# Allegro board NVR.brd
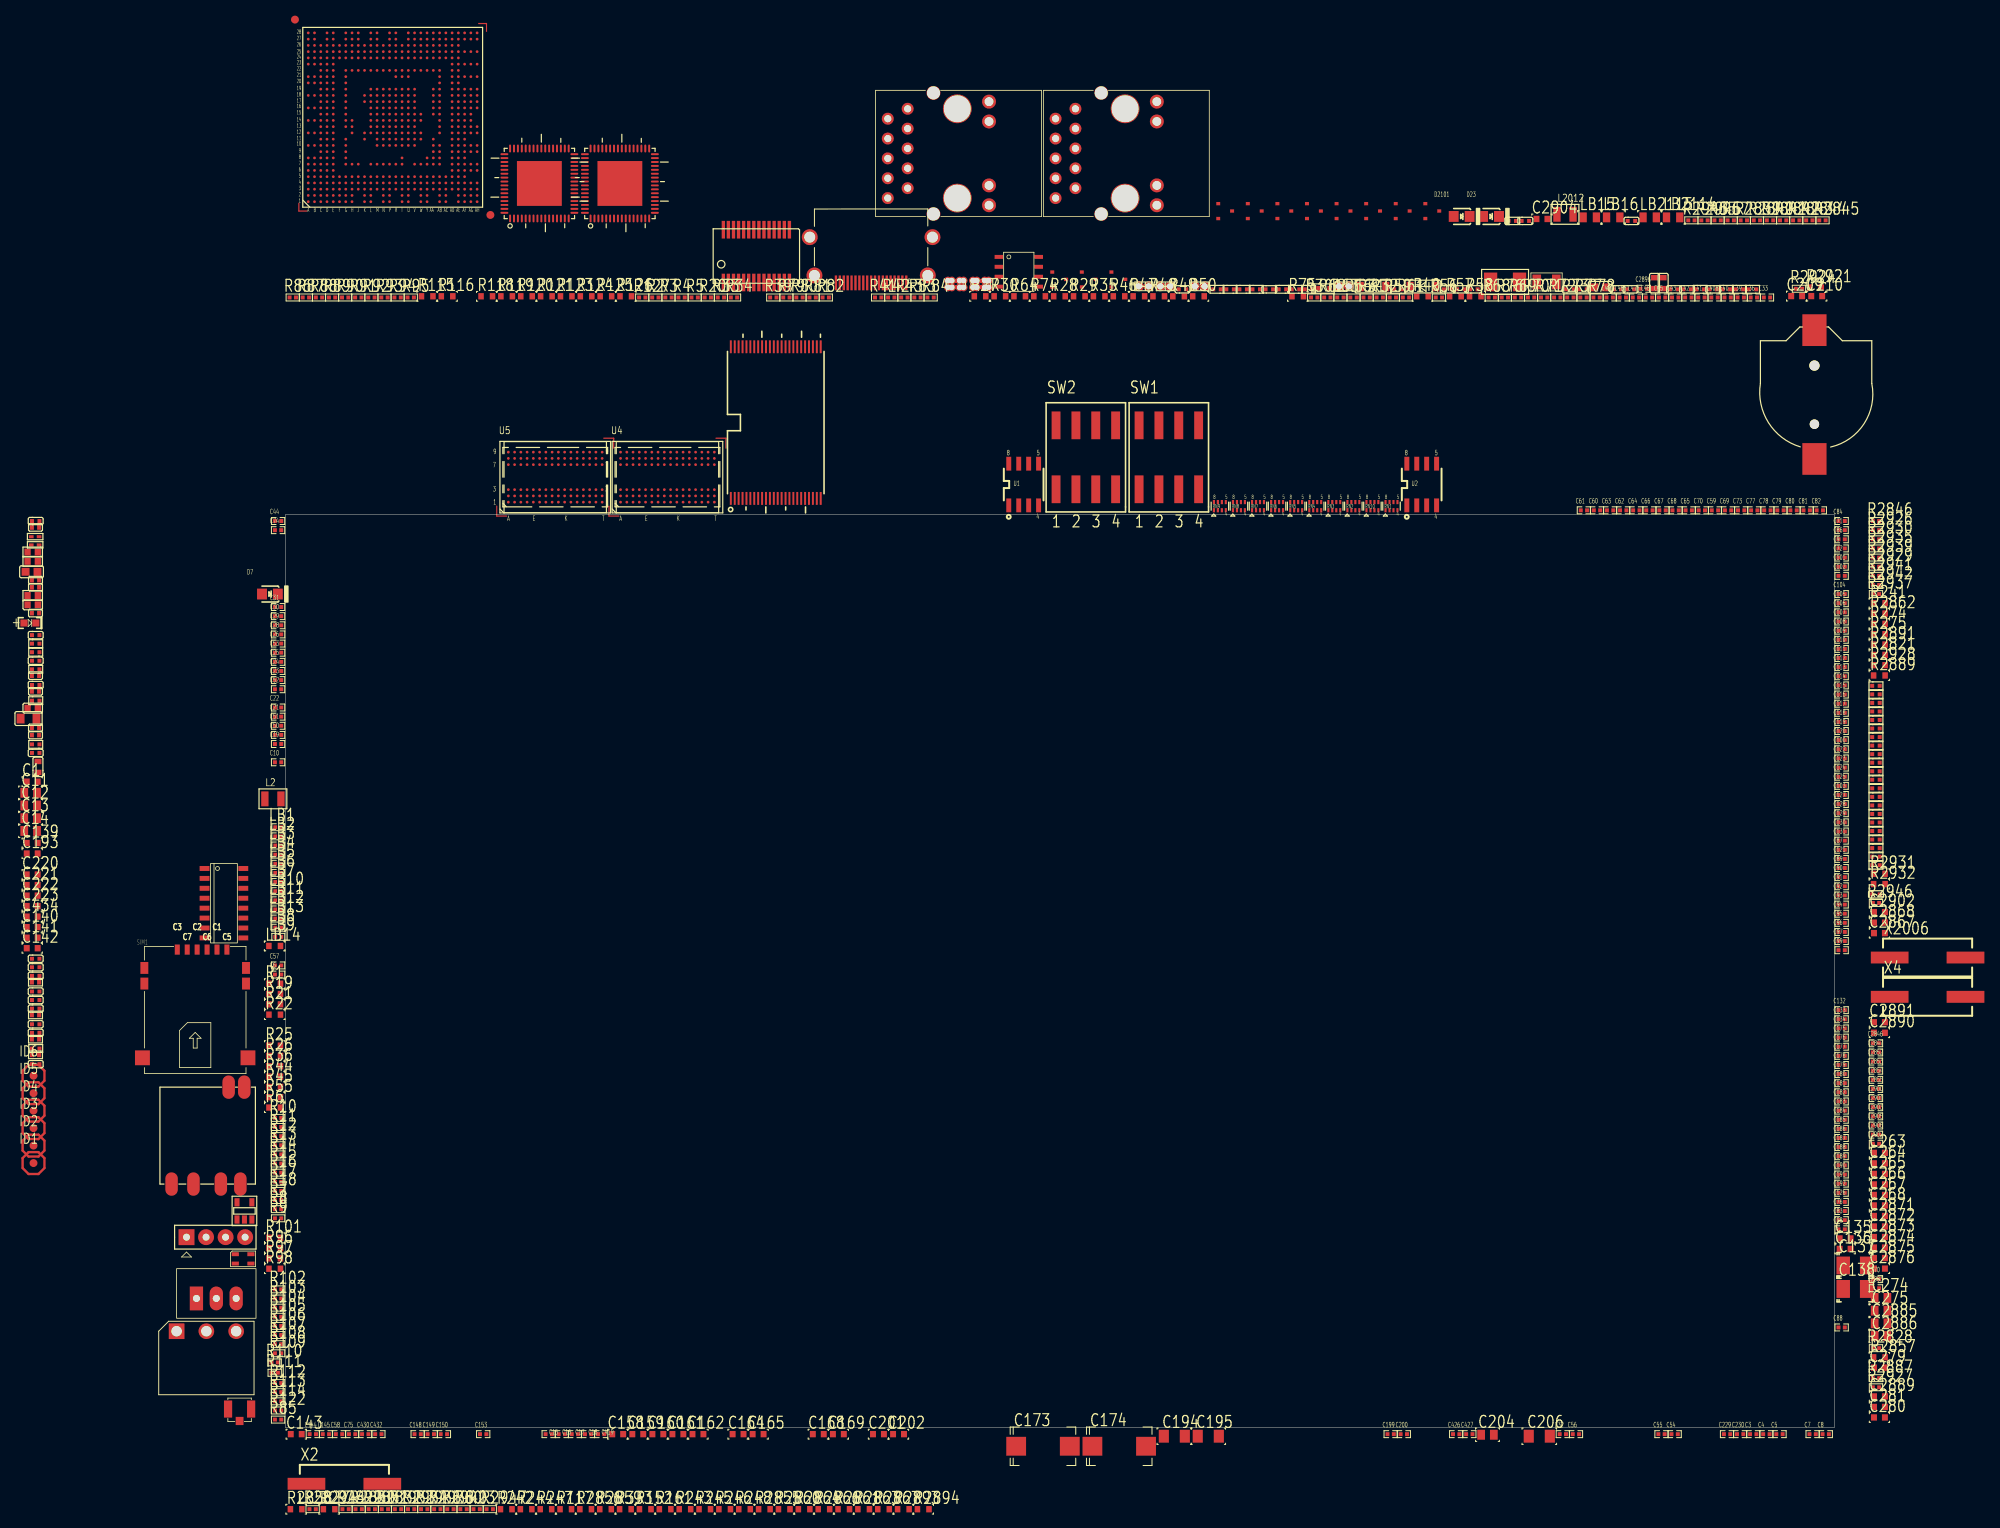
[diagram p0: board, top side]
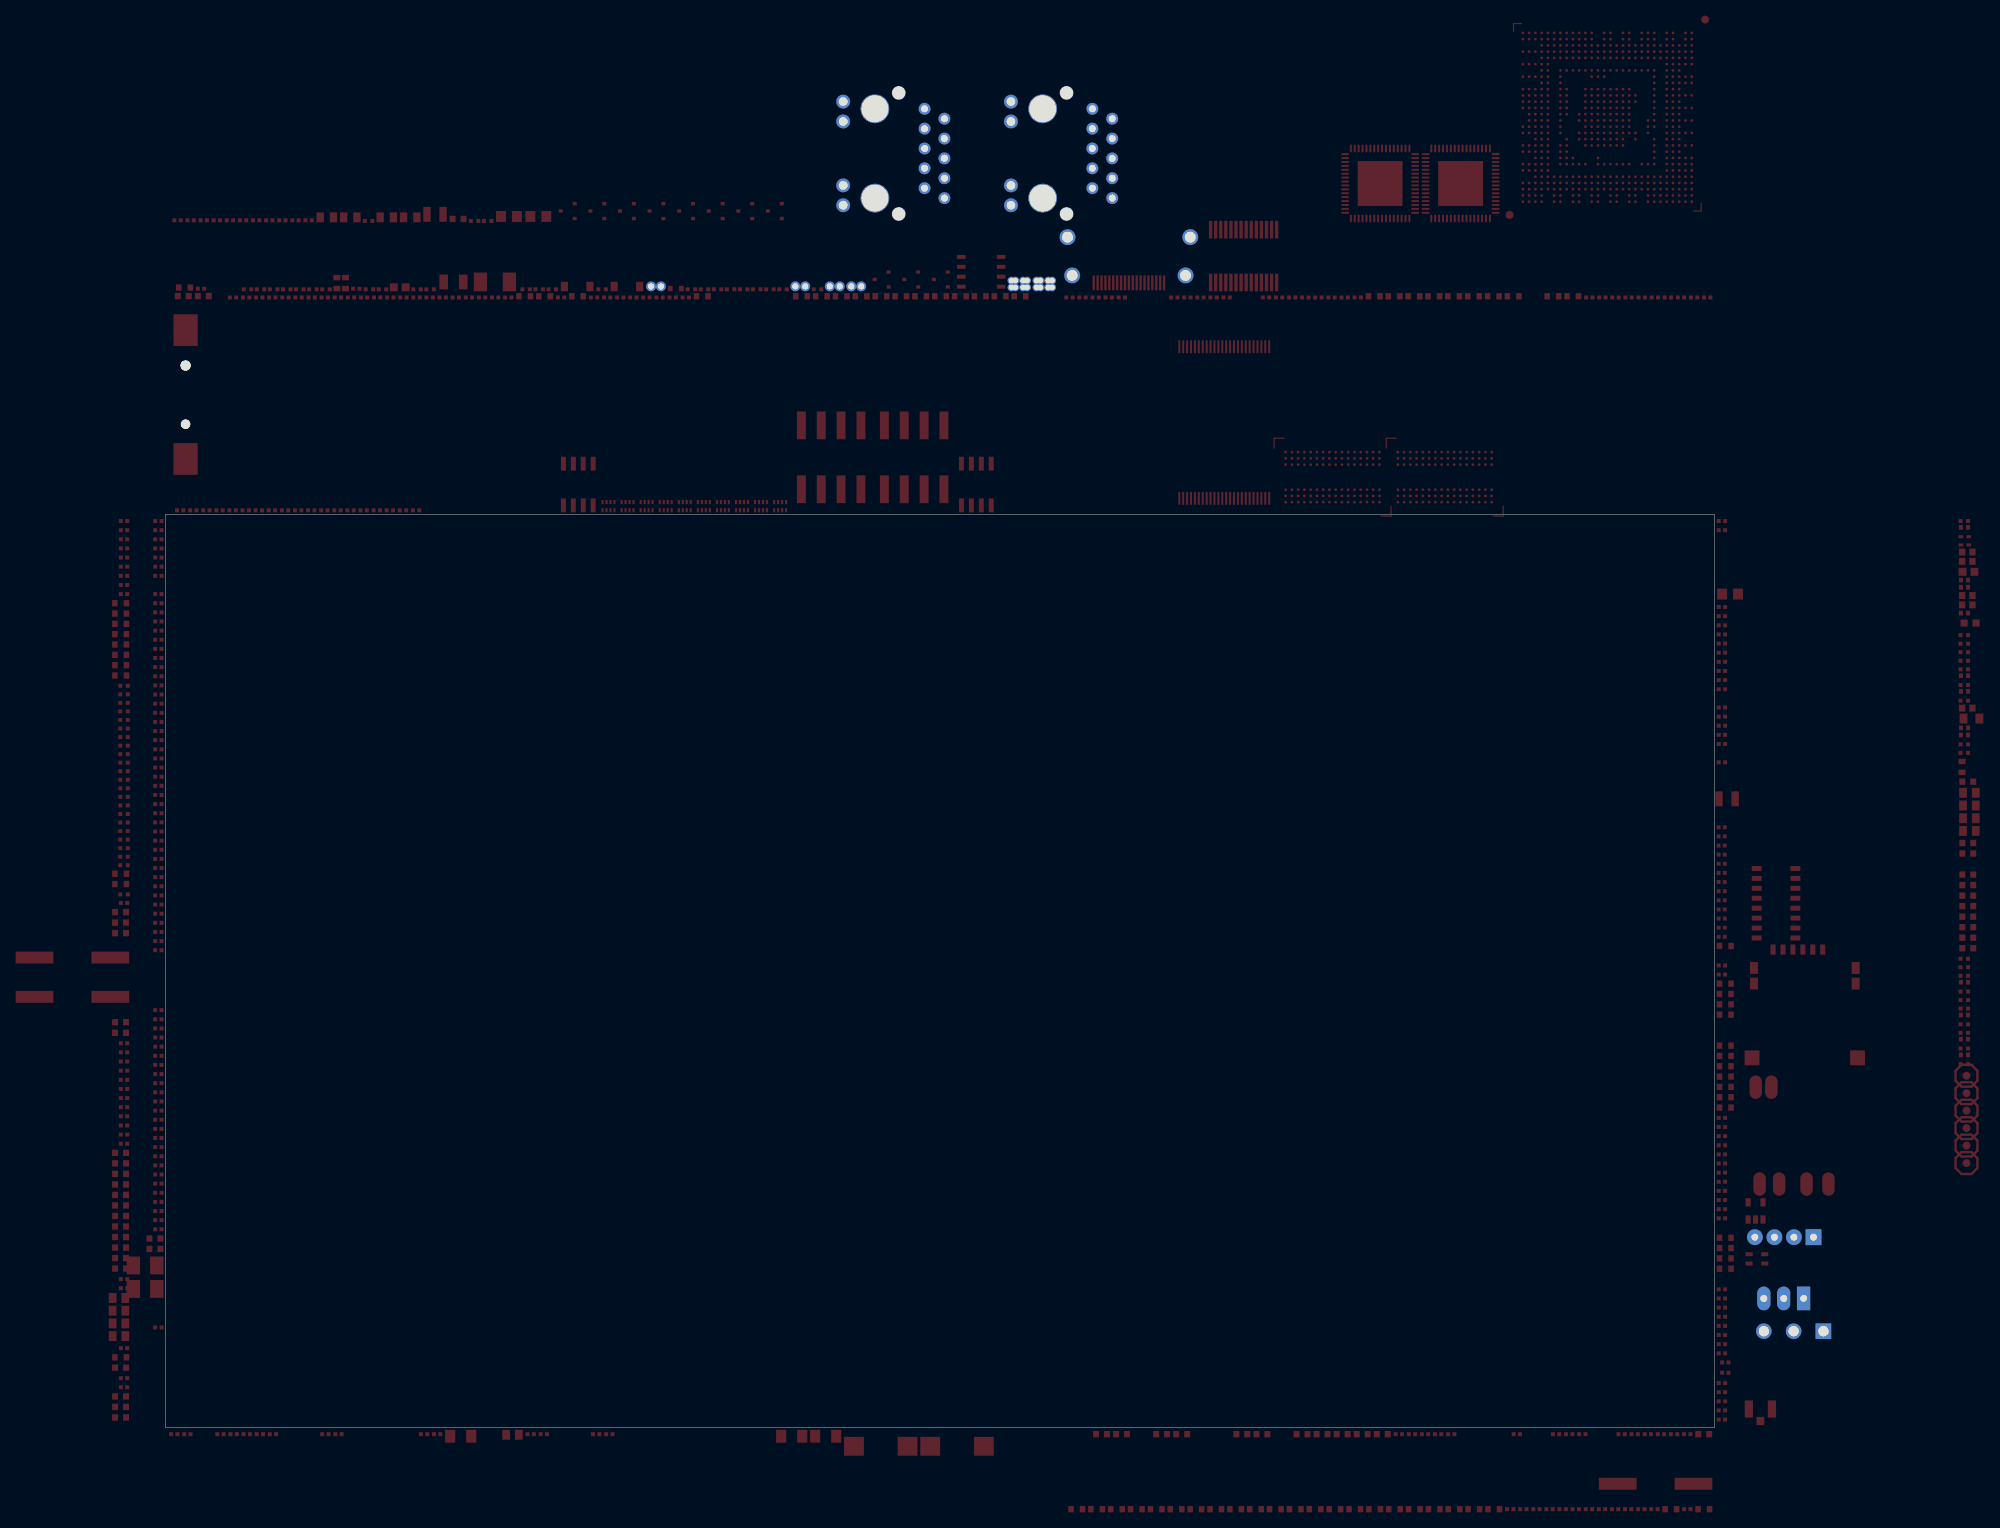
[diagram p1: board, bottom side, seen from below]

Outline 198.12 x 116.84 mm; copper layers: TOP, BOTTOM. Coordinates in mm from the lower left corner of the outline.
Outline path: 0,116.84 198.12,116.84 198.12,0 0,0 0,116.84

## Design rules (mm)
net group USB_D1: nets HUB_DM2 HUB_DP2
net group USB_HOST: nets USB2_DM0 USB2_DP0

## Placement (name value [footprint] x y rotation side)
BT1  BAT_3V  [BAT_CR1220]  195.58 132.08 0 top
C1  1NF  [SC0603]  -32.39 82.65 0 top
C3  220NF  [SC0402]  187.76 -0.84 0 top
C4  220NF  [SC0402]  189.43 -0.84 0 top
C5  220NF  [SC0402]  191.11 -0.84 0 top
C6  220NF  [SC0402]  -0.94 57.97 0 top
C7  220NF  [SC0402]  195.35 -0.84 0 top
C8  220NF  [SC0402]  197.03 -0.84 0 top
C9  100NF  [SC0402]  199.06 112.5 0 top
C10  100NF  [SC0402]  -0.94 85.13 0 top
C11  10UF  [SC0805]  -32.59 81.23 0 top
C12  10UF  [SC0805]  -32.59 79.6 0 top
C13  10UF  [SC0805]  -32.59 77.98 0 top
C14  10UF  [SC0805]  -32.59 76.35 0 top
C15  2.2UF  [HSC0402]  33.68 -0.84 0 top
C16  2.2UF  [HSC0402]  35.36 -0.84 0 top
C17  2.2UF  [HSC0402]  37.03 -0.84 0 top
C18  2.2UF  [HSC0402]  38.71 -0.84 0 top
C19  100NF  [SC0402]  -0.94 87.47 0 top
C21  100NF  [SC0402]  -0.94 90.98 0 top
C22  100NF  [SC0402]  -0.94 92.14 0 top
C23  100NF  [SC0402]  -0.94 95.65 0 top
C24  100NF  [SC0402]  -0.94 96.82 0 top
C25  100NF  [SC0402]  -0.94 97.99 0 top
C26  100NF  [SC0402]  -0.94 100.32 0 top
C28  100NF  [SC0402]  -0.94 101.49 0 top
C29  100NF  [SC0402]  -0.94 102.66 0 top
C30  100NF  [SC0402]  -0.94 103.83 0 top
C31  100NF  [SC0402]  -0.94 105 0 top
C32  100NF  [SC0402]  163.4 -0.84 0 top
C33  100NF  [SC0402]  189.51 144.61 0 top
C36  100NF  [SC0402]  187.83 144.61 0 top
C39  100NF  [SC0402]  186.16 144.61 0 top
C40  100NF  [SC0402]  184.48 144.61 0 top
C41  100NF  [SC0402]  181.13 144.61 0 top
C42  100NF  [SC0402]  179.45 144.61 0 top
C43  100NF  [SC0402]  177.77 144.61 0 top
C44  22PF  [SC0402]  -0.94 116 0 top
C45  100NF  [SC0402]  176.1 144.61 0 top
C46  100NF  [SC0402]  174.42 144.61 0 top
C47  100NF  [SC0402]  172.75 144.61 0 top
C48  100NF  [SC0402]  171.07 144.61 0 top
C49  100NF  [SC0402]  169.39 144.61 0 top
C50  100NF  [SC0402]  -0.94 88.64 0 top
C51  100NF  [SC0402]  -0.94 89.81 0 top
C52  100NF  [SC0402]  -0.94 94.48 0 top
C53  100NF  [SC0402]  -0.94 99.15 0 top
C54  100NF  [SC0402]  177.7 -0.84 0 top
C55  100NF  [SC0402]  176.02 -0.84 0 top
C56  100NF  [SC0402]  165.07 -0.84 0 top
C57  100NF  [SC0402]  -0.94 59.14 0 top
C58  100NF  [SC0402]  6.86 -0.84 0 top
C59  100NF  [SC0402]  182.86 117.37 0 top
C60  100NF  [SC0402]  167.77 117.37 0 top
C61  100NF  [SC0402]  166.09 117.37 0 top
C62  100NF  [SC0402]  171.12 117.37 0 top
C63  100NF  [SC0402]  169.45 117.37 0 top
C64  100NF  [SC0402]  172.8 117.37 0 top
C65  100NF  [SC0402]  179.5 117.37 0 top
C66  100NF  [SC0402]  174.48 117.37 0 top
C67  100NF  [SC0402]  176.15 117.37 0 top
C68  100NF  [SC0402]  177.83 117.37 0 top
C69  100NF  [SC0402]  184.53 117.37 0 top
C70  100NF  [SC0402]  181.18 117.37 0 top
C71  100NF  [SC0402]  199.06 114.83 0 top
C72  100NF  [SC0402]  199.06 111.33 0 top
C73  100NF  [SC0402]  186.21 117.37 0 top
C74  22PF  [SC0402]  -0.94 114.83 0 top
C75  1UF  [SC0402]  8.53 -0.84 0 top
C76  1UF  [SC0402]  199.06 27.71 0 top
C77  100NF  [SC0402]  187.89 117.37 0 top
C78  100NF  [SC0402]  189.56 117.37 0 top
C79  100NF  [SC0402]  191.24 117.37 0 top
C80  100NF  [SC0402]  192.92 117.37 0 top
C81  100NF  [SC0402]  194.59 117.37 0 top
C82  100NF  [SC0402]  196.27 117.37 0 top
C83  1UF  [SC0402]  199.06 26.54 0 top
C84  100NF  [SC0402]  199.06 116 0 top
C86  100NF  [SC0402]  199.06 113.66 0 top
C87  100NF  [SC0402]  199.06 73.94 0 top
C88  100NF  [SC0402]  199.06 12.81 0 top
C89  100NF  [SC0402]  199.06 71.6 0 top
C90  100NF  [SC0402]  199.06 70.43 0 top
C91  100NF  [SC0402]  199.06 69.27 0 top
C92  100NF  [SC0402]  199.06 68.1 0 top
C93  100NF  [SC0402]  199.06 66.93 0 top
C94  100NF  [SC0402]  199.06 65.76 0 top
C95  100NF  [SC0402]  199.06 64.59 0 top
C96  100NF  [SC0402]  199.06 63.42 0 top
C97  100NF  [SC0402]  199.06 62.26 0 top
C98  1UF  [SC0402]  199.06 25.37 0 top
C99  100NF  [SC0402]  199.06 61.09 0 top
C100  100NF  [SC0402]  199.06 86.79 0 top
C101  100NF  [SC0402]  199.06 110.16 0 top
C102  100NF  [SC0402]  199.06 108.99 0 top
C103  100NF  [SC0402]  199.06 80.95 0 top
C104  100NF  [SC0402]  199.06 106.65 0 top
C105  100NF  [SC0402]  199.06 105.49 0 top
C106  100NF  [SC0402]  199.06 104.32 0 top
C107  100NF  [SC0402]  199.06 103.15 0 top
C108  100NF  [SC0402]  199.06 101.98 0 top
C109  100NF  [SC0402]  199.06 100.81 0 top
C110  100NF  [SC0402]  199.06 99.64 0 top
C111  100NF  [SC0402]  199.06 98.48 0 top
C112  100NF  [SC0402]  199.06 97.31 0 top
C113  100NF  [SC0402]  199.06 96.14 0 top
C114  100NF  [SC0402]  199.06 94.97 0 top
C115  100NF  [SC0402]  199.06 93.8 0 top
C116  100NF  [SC0402]  199.06 92.63 0 top
C117  100NF  [SC0402]  199.06 91.47 0 top
C118  100NF  [SC0402]  199.06 90.3 0 top
C119  100NF  [SC0402]  199.06 89.13 0 top
C120  100NF  [SC0402]  199.06 87.96 0 top
C121  100NF  [SC0402]  199.06 72.77 0 top
C122  100NF  [SC0402]  199.06 85.62 0 top
C123  100NF  [SC0402]  199.06 84.45 0 top
C124  100NF  [SC0402]  199.06 83.29 0 top
C125  100NF  [SC0402]  199.06 82.12 0 top
C126  100NF  [SC0402]  199.06 28.88 0 top
C127  100NF  [SC0402]  199.06 79.78 0 top
C128  100NF  [SC0402]  199.06 78.61 0 top
C129  100NF  [SC0402]  199.06 77.44 0 top
C130  100NF  [SC0402]  199.06 76.28 0 top
C131  100NF  [SC0402]  199.06 75.11 0 top
C132  1UF  [SC0402]  199.06 53.42 0 top
C133  1UF  [SC0402]  199.06 52.25 0 top
C134  1UF  [SC0402]  199.06 51.08 0 top
C135  27PF  [SC0603]  199.5 24.21 0 top
C136  27PF  [SC0603]  199.5 22.86 0 top
C137  220UF  [STC3528]  200.76 20.75 0 top
C138  220UF  [STC3528]  200.76 17.75 0 top
C139  10UF  [SC0603]  -32.39 74.8 0 top
C140  2.2UF  [SC0603]  -32.39 64.03 0 top
C141  2.2UF  [SC0603]  -32.39 62.69 0 top
C142  2.2UF  [SC0603]  -32.39 61.34 0 top
C143  2.2UF  [SC0603]  1.38 -0.84 0 top
C144  100NF  [SC0402]  3.51 -0.84 0 top
C145  100NF  [SC0402]  5.18 -0.84 0 top
C148  10NF  [SC0402]  16.92 -0.84 0 top
C149  10NF  [SC0402]  18.59 -0.84 0 top
C150  10NF  [SC0402]  20.27 -0.84 0 top
C153  10NF  [SC0402]  25.3 -0.84 0 top
C158  100NF  [SC0603]  42.51 -0.84 0 top
C159  100NF  [SC0603]  45.07 -0.84 0 top
C160  100NF  [SC0603]  47.64 -0.84 0 top
C161  100NF  [SC0603]  50.2 -0.84 0 top
C162  100NF  [SC0603]  52.77 -0.84 0 top
C164  100NF  [SC0603]  57.9 -0.84 0 top
C165  100NF  [SC0603]  60.46 -0.84 0 top
C168  100NF  [SC0603]  68.16 -0.84 0 top
C169  100NF  [SC0603]  70.73 -0.84 0 top
C173  100UF  [STC7343]  96.9 -2.39 0 top
C174  100UF  [STC7343]  106.65 -2.39 0 top
C175  1UF  [SC0402]  199.06 49.91 0 top
C176  1UF  [SC0402]  199.06 48.74 0 top
C177  1UF  [SC0402]  199.06 47.57 0 top
C178  1UF  [SC0402]  199.06 46.41 0 top
C179  1UF  [SC0402]  199.06 45.24 0 top
C180  1UF  [SC0402]  199.06 44.07 0 top
C181  1UF  [SC0402]  199.06 42.9 0 top
C182  1UF  [SC0402]  199.06 41.73 0 top
C183  1UF  [SC0402]  199.06 40.56 0 top
C184  1UF  [SC0402]  199.06 39.4 0 top
C185  1UF  [SC0402]  199.06 38.23 0 top
C186  1UF  [SC0402]  199.06 37.06 0 top
C187  1UF  [SC0402]  199.06 35.89 0 top
C188  1UF  [SC0402]  199.06 34.72 0 top
C189  1UF  [SC0402]  199.06 33.55 0 top
C190  1UF  [SC0402]  199.06 32.39 0 top
C191  1UF  [SC0402]  199.06 31.22 0 top
C192  1UF  [SC0402]  199.06 30.05 0 top
C193  10UF  [SC0603]  -32.39 73.46 0 top
C194  22UF  [SC1206]  113.7 -1.1 0 top
C195  22UF  [SC1206]  118.05 -1.1 0 top
C199  1NF  [SC0402]  141.38 -0.84 0 top
C200  1NF  [SC0402]  143.05 -0.84 0 top
C201  10UF  [SC0603]  75.86 -0.84 0 top
C202  10UF  [SC0603]  78.42 -0.84 0 top
C204  10UF  [SC0805]  153.76 -0.91 0 top
C206  4.7UF  [SC1206]  160.39 -1.1 0 top
C209  10NF  [SC0603]  193.31 144.79 0 top
C210  10NF  [SC0603]  195.87 144.79 0 top
C220  10UF  [SC0603]  -32.39 70.77 0 top
C221  10UF  [SC0603]  -32.39 69.42 0 top
C222  10UF  [SC0603]  -32.39 68.07 0 top
C223  10UF  [SC0603]  -32.39 66.73 0 top
C224  0.1uF  [C0402]  -31.94 116 0 top
C229  470NF  [SC0402]  184.4 -0.84 0 top
C230  470NF  [SC0402]  186.08 -0.84 0 top
C263  100NF  [SC0603]  203.9 35.16 0 top
C264  100NF  [SC0603]  203.9 33.81 0 top
C265  100NF  [SC0603]  203.9 32.46 0 top
C266  100NF  [SC0603]  203.9 31.12 0 top
C267  100NF  [SC0603]  203.9 29.77 0 top
C268  100NF  [SC0603]  203.9 28.42 0 top
C270  1NF  [SC0402]  203.45 19 0 top
C274  10UF  [SC0805]  204.1 16.59 0 top
C275  10UF  [SC0805]  204.1 14.96 0 top
C279  4.7UF  [SC0603]  203.9 7.67 0 top
C280  4.7UF  [SC0603]  203.9 1.3 0 top
C281  4.7UF  [SC0603]  203.9 2.64 0 top
C408  100NF  [SC0402]  182.8 144.61 0 top
C419  2.2UF  [HSC0402]  40.39 -0.84 0 top
C426  100NF  [SC0402]  149.76 -0.84 0 top
C427  100NF  [SC0402]  151.43 -0.84 0 top
C430  100NF  [SC0402]  10.21 -0.84 0 top
C432  100NF  [SC0402]  11.89 -0.84 0 top
C434  10UF  [SC0603]  -32.39 65.38 0 top
C1980  1uF  [C0402]  164.3 145.65 0 top
C1993  0.1uF  [C0402]  -31.94 46.5 0 top
C2035  0.1uF  [C0402]  -31.94 55.8 0 top
C2036  8pF  [C0402]  182.64 145.65 0 top
C2037  8pF  [C0402]  177.62 145.65 0 top
C2038  4.7uF  [C0603]  176.23 146.45 0 top
C2039  0.1uF  [C0402]  172.06 145.65 0 top
C2040  0.1uF  [C0402]  170.39 145.65 0 top
C2041  0.1uF  [C0402]  152.02 145.65 0 top
C2044  1uF  [C0402]  165.97 145.65 0 top
C2046  0.1uF  [C0402]  -31.94 57.81 0 top
C2049  0.1uF  [C0402]  -31.94 58.9 0 top
C2050  1uF  [C0402]  -31.94 60 0 top
C2051  4.7uF  [C0603]  -31.66 84.54 0 top
C2052  0.1uF  [C0402]  -31.94 86.33 0 top
C2053  8pF  [C0402]  148.67 145.65 0 top
C2054  8pF  [C0402]  125.85 145.65 0 top
C2094  1U  [C0402]  -31.94 98.12 0 top
C2095  1U  [C0402]  -31.94 101.4 0 top
C2096  1U  [C0402]  -31.94 50.51 0 top
C2097  1U  [C0402]  -31.94 53.62 0 top
C2173  1U  [C0402]  -31.94 54.71 0 top
C2174  22uF  [C0805]  -32.86 90.73 0 top
C2175  matching circuit, will be determined  [C0402]  -31.94 95.02 0 top
C2176  matching circuit, will be determined  [C0402]  -31.94 51.61 0 top
C2177  0.1uF  [SMC0402]  -31.97 96.22 0 top
C2178  10uF/6.3V  [SMC0603]  -32.33 92.06 0 top
C2179  33pF  [SMC0402]  -31.97 104.22 0 top
C2180  0.1uF  [SMC0402]  -31.97 108.44 0 top
C2181  0.1uF  [SMC0402]  -31.97 88.62 0 top
C2182  10uF/6.3V  [SMC0603]  -32.33 105.28 0 top
C2183  33pF  [SMC0402]  -31.97 94.21 0 top
C2184  0.1uF  [SMC0402]  -31.97 115.19 0 top
C2185  0.1uF  [SMC0402]  -31.97 89.54 0 top
C2186  33pF  [SMC0402]  -31.97 107.53 0 top
C2187  0.1uF  [C0402]  114.74 145.65 0 top
C2846  100NF  [SC0402]  203.45 49.18 0 top
C2847  100NF  [SC0402]  203.45 48.01 0 top
C2852  100NF  [SC0402]  203.45 46.84 0 top
C2853  100NF  [SC0402]  203.45 45.67 0 top
C2854  100NF  [SC0402]  203.45 44.5 0 top
C2855  100NF  [SC0402]  203.45 43.33 0 top
C2867  20PF  [SC0603]  203.9 63.27 0 top
C2868  20PF  [SC0603]  203.9 64.62 0 top
C2871  100NF  [SC0603]  203.9 27.08 0 top
C2872  100NF  [SC0603]  203.9 25.73 0 top
C2873  100NF  [SC0603]  203.9 24.39 0 top
C2874  100NF  [SC0603]  203.9 23.04 0 top
C2875  100NF  [SC0603]  203.9 21.69 0 top
C2876  100NF  [SC0603]  203.9 20.35 0 top
C2883  1NF  [SC0402]  203.45 17.83 0 top
C2885  10UF  [SC0805]  204.1 13.34 0 top
C2886  10UF  [SC0805]  204.1 11.71 0 top
C2889  4.7UF  [SC0603]  203.9 3.99 0 top
C2890  4.7UF  [SC0603]  203.9 50.52 0 top
C2891  4.7UF  [SC0603]  203.9 51.87 0 top
C2892  10nF  [C0402]  158.61 154.4 0 top
C2893  NC/10nF  [C0402]  156.93 154.4 0 top
C2894  10nF  [C0402]  203.45 68.23 0 top
C2895  NC/10nF  [C0402]  172.17 154.4 0 top
C2896  100NF  [SC0402]  173.74 145.73 0 top
C2897  1uF  [C0402]  179.29 145.65 0 top
C2898  0.1uF  [C0402]  150.35 145.65 0 top
C2899  4.7uF  [C0603]  175.13 146.45 0 top
C2900  100NF  [SC0402]  203.45 42.17 0 top
C2901  100NF  [SC0402]  203.45 41 0 top
C2902  20PF  [SC0603]  203.9 65.97 0 top
C2903  100NF  [SC0402]  203.45 39.83 0 top
C2904  20PF  [SC0603]  160.72 154.66 0 top
C2905  100NF  [SC0402]  203.45 38.66 0 top
C2906  100NF  [SC0402]  203.45 37.49 0 top
C2907  100NF  [SC0402]  203.45 36.32 0 top
D2  1N5819  [SOD123]  145.49 146.01 0 top
D4  NC/1N5819  [SOD123]  139.12 146.01 0 top
D7  LED  [SD0805-LED]  -1.98 106.66 0 top
D23  LED  [SD0805-LED]  154.22 154.97 0 top
D49  1N4148  [SOD523]  132.87 145.75 0 top
D2101  LED  [SD0805-LED]  150.46 154.97 0 top
ED15  NC/ESD9B5VL  [E0402N]  135.41 146.03 0 top
ED16  NC/ESD9B5VL  [E0402N]  116.95 146.03 0 top
ED17  NC/ESD9B5VL  [E0402N]  112.54 146.03 0 top
ED18  NC/ESD9B5VL  [E0402N]  109.79 146.03 0 top
ED25  NC/ESDA6V8UL/AZC199-02S  [SOT23]  135.34 155.67 0 top
ED26  NC/ESDA6V8UL/AZC199-02S  [SOT23]  139.13 155.67 0 top
ED27  NC/ESDA6V8UL/AZC199-02S  [SOT23]  127.77 155.67 0 top
ED28  NC/ESDA6V8UL/AZC199-02S  [SOT23]  131.56 155.67 0 top
ED29  NC/ESDA6V8UL/AZC199-02S  [SOT23]  142.91 155.67 0 top
ED30  NC/ESDA6V8UL/AZC199-02S  [SOT23]  120.2 155.67 0 top
ED31  NC/ESDA6V8UL/AZC199-02S  [SOT23]  123.99 155.67 0 top
ED32  NC/ESDA6V8UL/AZC199-02S  [SOT23]  146.7 155.67 0 top
ESD811  ES0402V014BT  [ESD0402]  -32.01 112.96 0 top
ESD812  ES0402V014BT  [ESD0402]  -32.01 114.01 0 top
FB3  BLM18PG181SN1  [L0603]  168.18 145.9 0 top
FB5  BLM18PG181SN1  [L0603]  -32.48 109.51 0 top
FB10  31/3A-L3  [SMR0603]  -32.33 112.03 0 top
FB1605  31/3A-L3  [SMR0603]  -32.33 106.47 0 top
FB1606  31/3A-L3  [SMR0603]  -32.33 110.84 0 top
ID1  -  [ID-BOARD]  -32.22 33.85 0 top
ID2  -  [ID-BOARD]  -32.22 36.08 0 top
ID3  -  [ID-BOARD]  -32.22 38.32 0 top
ID4  -  [ID-BOARD]  -32.22 40.55 0 top
ID5  -  [ID-BOARD]  -32.22 42.79 0 top
ID6  -  [ID-BOARD]  -32.22 45.03 0 top
J18  LPJG4813HENL  [SI-51009-F]  78.32 163.04 0 top
J19  LPJG4813HENL  [SI-51009-F]  99.78 163.04 0 top
J21  CON3  [ANTENNA_WIFI]  -5.86 2.38 0 top
J0701  DEBUG  [CONN3_BOX]  -10.11 16.53 0 top
J0702  691322310003  [PHEONIX_CONN_3]  -13.92 12.34 0 top
J1851  HEADER 4 2.54mm /NC  [HEADER-4]  -12.65 24.37 0 top
J1852  10029449-111RLF  [HDMI_A]  70.42 146.48 0 top
L2  2.2UH  [HSL1008]  -1.6 80.46 0 top
L14  matching circuit,will be determined  [R0402]  -31.94 93.02 0 top
L2012  2.2UH  [HSL1008]  163.68 155.25 0 top
LB1  LB  [SL0402]  -0.91 76.82 0 top
LB2  LB  [SL0402]  -0.91 75.65 0 top
LB3  LB  [SL0402]  -0.91 74.48 0 top
LB4  LB  [SL0402]  -0.91 73.31 0 top
LB5  LB  [SL0402]  -0.91 72.15 0 top
LB6  LB  [SL0402]  -0.91 70.98 0 top
LB7  LB  [SL0402]  -0.91 69.81 0 top
LB8  LB  [SL0402]  -0.91 63.97 0 top
LB9  LB  [SL0402]  -0.91 62.8 0 top
LB10  LB  [SL0402]  -0.91 68.64 0 top
LB11  LB  [SL0402]  -0.91 67.47 0 top
LB12  LB  [SL0402]  -0.91 66.3 0 top
LB13  LB  [SL0402]  -0.91 65.13 0 top
LB14  LB  [SL0603]  -1.37 61.63 0 top
LB15  LB  [SL0805]  166.84 154.86 0 top
LB16  LB  [SL0805]  169.84 154.86 0 top
LB2114  LB  [SL0805]  177.51 154.86 0 top
LB2115  LB  [SL0805]  174.51 154.86 0 top
LED1  LED0603-G  [SM0603LED_AC]  -32.68 102.95 0 top
Q6  WNM2021/2SK3018  [SOT23]  106.54 146.92 0 top
Q7  WNM2021/2SK3018  [SOT23]  102.76 146.92 0 top
Q8  NC/WNM2021/2SK3018  [SOT23]  98.97 146.92 0 top
R1  10K  [SR0603]  -1.37 56.8 0 top
R2  120  [SR0402]  47.32 144.61 0 top
R3  120  [SR0402]  49 144.61 0 top
R4  120  [SR0402]  50.67 144.61 0 top
R5  120  [SR0402]  52.35 144.61 0 top
R6  10K  [SR0603]  -1.37 40.95 0 top
R7  33  [SR0402]  -0.94 29.12 0 top
R8  33  [SR0402]  -0.94 27.95 0 top
R9  33  [SR0402]  -0.94 26.78 0 top
R10  33  [SR0402]  -0.94 39.63 0 top
R11  33  [SR0402]  -0.94 38.46 0 top
R12  33  [SR0402]  -0.94 37.3 0 top
R13  33  [SR0402]  -0.94 36.13 0 top
R14  33  [SR0402]  -0.94 34.96 0 top
R15  33  [SR0402]  -0.94 33.79 0 top
R16  33  [SR0402]  -0.94 32.62 0 top
R17  33  [SR0402]  -0.94 31.45 0 top
R18  33  [SR0402]  -0.94 30.29 0 top
R19  10K  [SR0603]  -1.37 55.48 0 top
R20  1K  [SR0402]  54.03 144.61 0 top
R21  10K  [SR0603]  -1.37 54.16 0 top
R22  10K  [SR0603]  -1.37 52.84 0 top
R23  1K  [SR0402]  24.46 -10.44 0 top
R25  10K  [SR0603]  -1.37 48.88 0 top
R26  10K  [SR0603]  -1.37 47.56 0 top
R27  4.7K/NC  [SR0603]  88.85 144.76 0 top
R28  4.7K  [SR0603]  99.01 144.76 0 top
R29  4.7K  [SR0603]  101.55 144.76 0 top
R30  4.7K/NC  [SR0603]  91.39 144.76 0 top
R31  0  [SR0402]  138.3 144.61 0 top
R32  0  [SR0402]  139.98 144.61 0 top
R33  1K  [SR0402]  55.7 144.61 0 top
R34  1K  [SR0402]  57.38 144.61 0 top
R35  4.7K  [SR0603]  104.09 144.76 0 top
R36  10K  [SR0603]  -1.37 46.24 0 top
R39  1K  [SR0402]  62.41 144.61 0 top
R40  1.13K  [SR0603]  145.44 144.76 0 top
R41  10K  [SR0402]  75.82 144.61 0 top
R42  10K  [SR0402]  77.5 144.61 0 top
R43  10K  [SR0402]  79.17 144.61 0 top
R44  10K  [SR0603]  -1.37 44.92 0 top
R45  10K  [SR0603]  -1.37 43.6 0 top
R46  4.7K  [SR0603]  106.63 144.76 0 top
R47  4.7K  [SR0603]  109.17 144.76 0 top
R48  4.7K  [SR0603]  111.71 144.76 0 top
R49  4.7K  [SR0603]  114.25 144.76 0 top
R50  4.7K  [SR0603]  116.79 144.76 0 top
R55  10K  [SR0603]  -1.37 42.27 0 top
R56  1MEG  [SR0402]  147.55 144.61 0 top
R57  270  [SR0603]  149.66 144.76 0 top
R58  270  [SR0603]  152.2 144.76 0 top
R59  0  [SR0402]  141.66 144.61 0 top
R60  33  [SR0402]  22.78 -10.44 0 top
R61  0  [SR0402]  143.33 144.61 0 top
R62  75  [SR0402]  133.27 144.61 0 top
R63  75  [SR0402]  134.95 144.61 0 top
R64  4.7K/NC  [SR0603]  93.93 144.76 0 top
R65  0/NC  [SR0402]  183.2 154.48 0 top
R66  75  [SR0402]  136.63 144.61 0 top
R67  0/NC  [SR0402]  184.87 154.48 0 top
R68  33K/NC  [SR0402]  154.31 144.61 0 top
R69  10K  [SR0402]  157.66 144.61 0 top
R70  20K  [SR0402]  159.33 144.61 0 top
R71  240  [SR0402]  161.01 144.61 0 top
R72  240  [SR0402]  162.69 144.61 0 top
R73  240  [SR0402]  164.36 144.61 0 top
R74  4.7K/NC  [SR0603]  96.47 144.76 0 top
R75  4.7K  [SR0603]  129.49 144.76 0 top
R76  33K/NC  [SR0402]  155.98 144.61 0 top
R77  4.7K  [SR0402]  166.04 144.61 0 top
R78  470K  [SR0402]  167.72 144.61 0 top
R79  1K  [SR0402]  64.08 144.61 0 top
R80  1K  [SR0402]  65.76 144.61 0 top
R81  1K  [SR0402]  67.44 144.61 0 top
R82  1K  [SR0402]  69.11 144.61 0 top
R83  10K  [SR0402]  80.85 144.61 0 top
R84  10K  [SR0402]  82.52 144.61 0 top
R85  22  [SR0402]  -0.94 1.03 0 top
R86  22  [SR0402]  0.94 144.61 0 top
R87  22  [SR0402]  2.62 144.61 0 top
R88  22  [SR0402]  4.29 144.61 0 top
R89  22  [SR0402]  5.97 144.61 0 top
R90  22  [SR0402]  7.65 144.61 0 top
R91  22  [SR0402]  9.32 144.61 0 top
R92  22  [SR0402]  11 144.61 0 top
R93  22  [SR0402]  12.67 144.61 0 top
R94  22  [SR0402]  14.35 144.61 0 top
R95  22  [SR0402]  16.03 144.61 0 top
R96  100K  [SR0603]  -1.37 22.97 0 top
R97  100K  [SR0603]  -1.37 21.65 0 top
R98  100K  [SR0603]  -1.37 20.33 0 top
R101  100K  [SR0603]  -1.37 24.29 0 top
R102  1K  [SR0402]  -0.94 17.69 0 top
R103  1K  [SR0402]  -0.94 16.52 0 top
R104  1K  [SR0402]  -0.94 15.35 0 top
R105  1K  [SR0402]  -0.94 14.18 0 top
R106  1K  [SR0402]  -0.94 13.01 0 top
R107  1K  [SR0402]  -0.94 11.85 0 top
R108  1K  [SR0402]  -0.94 10.68 0 top
R109  1K  [SR0402]  -0.94 9.51 0 top
R110  0/NC  [SR0402]  -1.37 8.34 0 top
R111  0  [SR0402]  -1.37 7.02 0 top
R112  22  [SR0402]  -0.94 5.7 0 top
R113  22  [SR0402]  -0.94 4.53 0 top
R114  22  [SR0402]  -0.94 3.36 0 top
R115  0/NC  [SR0603]  18.14 144.76 0 top
R116  0/NC  [SR0603]  20.68 144.76 0 top
R117  4.7K  [SR0603]  35.86 -10.44 0 top
R118  4.7K  [SR0603]  25.76 144.76 0 top
R119  4.7K  [SR0603]  28.3 144.76 0 top
R120  4.7K  [SR0603]  30.84 144.76 0 top
R121  4.7K  [SR0603]  33.38 144.76 0 top
R122  22  [SR0402]  -0.94 2.19 0 top
R123  1K  [SR0603]  35.92 144.76 0 top
R124  1K  [SR0603]  38.46 144.76 0 top
R125  200  [SR0603]  41 144.76 0 top
R126  200  [SR0603]  43.54 144.76 0 top
R127  10  [SR0402]  45.64 144.61 0 top
R152  4.7K  [SR0603]  46.02 -10.44 0 top
R161  4.7K  [SR0603]  48.56 -10.44 0 top
R241  4.7K/CN  [SR0603]  203.88 105.49 0 top
R242  4.7K/NC  [SR0603]  28.24 -10.44 0 top
R243  4.7K  [SR0603]  51.1 -10.44 0 top
R244  4.7K/NC  [SR0603]  30.78 -10.44 0 top
R245  4.7K  [SR0603]  53.64 -10.44 0 top
R246  4.7K  [SR0603]  56.18 -10.44 0 top
R247  4.7K/NC  [SR0603]  33.32 -10.44 0 top
R248  4.7K  [SR0603]  58.72 -10.44 0 top
R274  470  [SR0603]  203.88 102.84 0 top
R275  2.49K  [SR0603]  203.88 101.52 0 top
R301  75  [SR0402]  131.6 144.61 0 top
R333  4.7K  [SR0603]  43.48 -10.44 0 top
R2290  10K  [R0402]  120.83 145.65 0 top
R2291  10K  [R0402]  -31.94 100.31 0 top
R2321  0R  [R0402]  -31.94 99.22 0 top
R2375  0R  [R0402]  -31.94 48.51 0 top
R2376  0R  [R0402]  -31.94 97.03 0 top
R2377  10K  [R0402]  119.16 145.65 0 top
R2378  100K  [R0402]  124.18 145.65 0 top
R2379  10K  [R0402]  122.51 145.65 0 top
R2380  10K  [R0402]  185.99 145.65 0 top
R2385  0R/NC  [R0402]  -31.94 87.43 0 top
R2386  0R  [SMR0402]  -31.97 52.8 0 top
R2387  0R/NM  [SMR0402]  -31.97 49.7 0 top
R2388  0R/NM  [SMR0402]  -31.97 57 0 top
R2389  240R  [SMR0402]  -31.97 47.69 0 top
R2821  1MEG  [SR0603]  203.88 98.88 0 top
R2827  33  [SR0402]  3.48 -10.44 0 top
R2828  33  [SR0402]  203.45 10.16 0 top
R2829  33  [SR0402]  7.7 -10.44 0 top
R2830  33  [SR0402]  9.37 -10.44 0 top
R2831  33  [SR0402]  11.05 -10.44 0 top
R2832  33  [SR0402]  12.73 -10.44 0 top
R2839  0  [SR0402]  186.55 154.48 0 top
R2840  0  [SR0402]  188.23 154.48 0 top
R2841  0  [SR0402]  189.9 154.48 0 top
R2842  0  [SR0402]  191.58 154.48 0 top
R2843  0  [SR0402]  193.25 154.48 0 top
R2844  0  [SR0402]  194.93 154.48 0 top
R2845  0  [SR0402]  196.61 154.48 0 top
R2846  0  [SR0402]  203.45 116 0 top
R2855  4.7K  [SR0603]  61.26 -10.44 0 top
R2856  4.7K  [SR0603]  38.4 -10.44 0 top
R2857  4.7K/NC  [SR0603]  203.88 8.99 0 top
R2858  4.7K/NC  [SR0603]  1.37 -10.44 0 top
R2859  4.7K  [SR0603]  40.94 -10.44 0 top
R2860  4.7K  [SR0603]  63.8 -10.44 0 top
R2861  4.7K  [SR0603]  71.42 -10.44 0 top
R2862  4.7K/CN  [SR0603]  203.88 104.17 0 top
R2863  4.7K  [SR0603]  73.96 -10.44 0 top
R2864  4.7K  [SR0603]  66.34 -10.44 0 top
R2866  4.7K  [SR0603]  68.88 -10.44 0 top
R2867  4.7K  [SR0603]  76.5 -10.44 0 top
R2887  4.7K  [SR0402]  203.45 6.33 0 top
R2889  470  [SR0603]  203.88 96.24 0 top
R2891  2.49K  [SR0603]  203.88 100.2 0 top
R2893  4.7K  [SR0603]  79.04 -10.44 0 top
R2894  4.7K  [SR0603]  81.58 -10.44 0 top
R2895  510R  [R0402]  203.45 94.92 0 top
R2896  0R  [R0402]  203.45 90.55 0 top
R2897  0R  [R0402]  203.45 89.45 0 top
R2898  0R  [R0402]  203.45 88.36 0 top
R2899  0R  [R0402]  203.45 87.27 0 top
R2900  0R  [R0402]  203.45 86.17 0 top
R2901  0R  [R0402]  203.45 85.08 0 top
R2902  0R  [R0402]  203.45 83.99 0 top
R2903  0R  [R0402]  203.45 82.89 0 top
R2904  NC/10  [R0402]  203.45 73.06 0 top
R2905  510R  [R0402]  203.45 93.83 0 top
R2906  510R  [R0402]  203.45 92.73 0 top
R2907  0R  [R0402]  203.45 81.8 0 top
R2908  0R  [R0402]  203.45 80.71 0 top
R2909  0R  [R0402]  203.45 79.61 0 top
R2910  0R  [R0402]  203.45 78.52 0 top
R2911  0R  [R0402]  203.45 77.43 0 top
R2912  0R  [R0402]  203.45 76.34 0 top
R2913  0R  [R0402]  203.45 75.24 0 top
R2914  0R  [R0402]  203.45 74.15 0 top
R2915  NC/10  [R0402]  203.45 71.96 0 top
R2916  510R  [R0402]  203.45 91.64 0 top
R2917  1.62K%1  [R0402]  127.53 145.65 0 top
R2918  1.62K%1  [R0402]  129.2 145.65 0 top
R2919  1.62K%1  [R0402]  130.87 145.65 0 top
R2920  1.62K%1  [R0402]  187.66 145.65 0 top
R2921  0/NC  [SR0603]  195.71 145.88 0 top
R2922  NC/10K  [R0402]  180.97 145.65 0 top
R2923  NC/10K  [R0402]  184.31 145.65 0 top
R2924  47K  [SR0402]  193.6 145.73 0 top
R2925  680R  [R0402]  142.31 145.65 0 top
R2926  0  [SR0402]  203.45 114.83 0 top
R2927  0  [SR0402]  203.45 5.16 0 top
R2928  1MEG  [SR0603]  203.88 97.56 0 top
R2929  0/NC  [SR0402]  203.45 110.16 0 top
R2930  0  [SR0402]  203.45 113.66 0 top
R2931  4.7K  [SR0603]  203.88 70.87 0 top
R2932  4.7K  [SR0603]  203.88 69.55 0 top
R2933  33  [SR0402]  14.4 -10.44 0 top
R2934  33  [SR0402]  16.08 -10.44 0 top
R2935  0  [SR0402]  203.45 112.5 0 top
R2936  33  [SR0402]  17.75 -10.44 0 top
R2937  0  [SR0402]  203.45 106.65 0 top
R2938  33  [SR0402]  19.43 -10.44 0 top
R2939  0  [SR0402]  203.45 111.33 0 top
R2940  33  [SR0402]  21.11 -10.44 0 top
R2941  0  [SR0402]  203.45 108.99 0 top
R2942  0  [SR0402]  203.45 107.82 0 top
R2943  0/NC  [SR0402]  179.84 154.48 0 top
R2944  4.7K/NC  [SR0603]  5.59 -10.44 0 top
R2945  0/NC  [SR0402]  181.52 154.48 0 top
R2946  0  [SR0402]  203.45 67.13 0 top
R2947  1K  [SR0402]  26.14 -10.44 0 top
RN1  33  [SRN8-0804]  141.48 117.91 0 top
RN2  33  [SRN8-0804]  136.6 117.91 0 top
RN3  33  [SRN8-0804]  134.16 117.91 0 top
RN4  33  [SRN8-0804]  131.72 117.91 0 top
RN5  33  [SRN8-0804]  129.29 117.91 0 top
RN6  33  [SRN8-0804]  126.85 117.91 0 top
RN7  33  [SRN8-0804]  124.41 117.91 0 top
RN8  33  [SRN8-0804]  121.97 117.91 0 top
RN9  33  [SRN8-0804]  119.53 117.91 0 top
RN10  33  [SRN8-0804]  139.04 117.91 0 top
SIM1  CR-201-6P  [MICRO_SIM]  -11.29 54.82 0 top
SW1  DSW4  [SDSW8-L]  113 124.16 0 top
SW2  DSW4  [SDSW8-L]  102.38 124.16 0 top
T2  DLW21SN900SQ2L  [CHOKE_COIL]  -5.41 21.79 0 top
U1  MIC2505  [SOP8-50-150]  94.43 120.68 0 top
U2  MIC2505  [SOP8-50-150]  145.34 120.68 0 top
U4  DDR3 DRAM-4GBIT-800MHZ-16BIT  [BGA96-32-1609G]  48.87 121.62 0 top
U5  DDR3 DRAM-4GBIT-800MHZ-16BIT  [BGA96-32-1609G]  34.51 121.62 0 top
U7  HI3535  [PBGA563-32-2828]  13.72 167.66 0 top
U10  H27U2G8F2CTR_BC  [SOP48-20-720A]  62.72 128.6 0 top
U24  RTL8211EG_1  [QFN64-050-0909LH]  42.78 159.2 0 top
U26  PT5108E23E-33/RT9013-33B  [SOT23-5]  -5.24 27.73 0 top
U28  RL-UM12BS-8188EUS  [WIFI_BT_R]  -9.56 37.36 0 top
U81  MCP7940M-I/SN  [SOIC-8]  93.81 147.9 0 top
U83  MAX3232  [SOIC16]  -7.87 67.1 0 top
U90  NC/RClamp0524PA/ESD5304/TPD4E02B04DQAR  [SLP2510P8]  88.94 146.33 0 top
U91  NC/RClamp0524PA/ESD5304/TPD4E02B04DQAR  [SLP2510P8]  85.74 146.33 0 top
U92  GL850G  [SSOP28]  60.24 149.9 0 top
U2050  RTL8211EG_1  [QFN64-050-0909LH]  32.49 159.2 0 top
X2  24MHZ  [SX2-1205]  7.54 -7.19 0 top
X3  12M/20pF  [5032-12M]  156.01 146.6 0 top
X4  25MHZ  [SX2-1205]  210.05 55.12 0 top
X2006  25MHZ  [SX2-1205]  210.05 60.15 0 top
Y6  32.768K  [CM315D]  161.31 146.6 0 top

## Library data of the parts
BT1 = CON2
C1 C3-C19 C21-C26 C28-C33 C36 C39-C84 C86 C98 C132-C136 C139-C145 C148-C150 C153 C158-C162 C164 C165 C168 C169 C175-C195 C199-C202 C204 C206 C209 C210 C220-C223 C229 C230 C263-C268 C270 C274 C275 C279-C281 C408 C419 C430 C432 C434 C2094-C2097 C2173 C2846 C2847 C2852-C2855 C2867 C2868 C2871-C2876 C2883 C2885 C2886 C2889-C2891 C2896 C2900-C2907 = C
C87-C97 C99-C131 C426 C427 = C: alternate symbols: ((T:SC0402;B:SC0402,SC0402-BGA,SC0402-BGA-A))
C137 C138 C173 C174 = CP
C224 C1980 C1993 C2035 C2046 C2051-C2054 C2174 = CAP NP
C2036 C2037 C2039-C2041 C2898 = CAPACITOR
C2038 C2897 C2899 = CAPACITOR_0
C2044 C2050 = CAP NP: room: USB+5V
C2049 = CAP NP_4
C2175 C2176 = C0603
C2177 C2180 C2181 C2185 = CAPC-SM0402_10: tolerance: 10%
C2178 C2182 = CAPC-SM0805_0
C2179 C2183 C2184 C2186 = CAPC-SM0402_4: room: ROOM10
C2187 = CAP NP_2
C2892-C2895 = CAP NP_2: room: CHG
D2 D4 = DIODE: room: CHG
D7 D23 D2101 = LED
D49 = DIODE_0
ED15-ED18 = TVS
ED25-ED32 = ESD_1
ESD811 ESD812 = ESD,ES0402V014BT_2
FB3 FB5 = INDUCTOR
FB10 FB1605 FB1606 = FB0603_0: room: ROOM9
ID1-ID6 = ID-BOARD
J18 J19 = RJ45_7
J21 = CON3
J0701 J0702 = HEADER 3
J1851 = HEADER 4
J1852 = HDMI_A
L2 L2012 = L
L14 = INDUCTOR_0
LB1-LB16 LB2114 LB2115 = LB
LED1 = LED_LTST-C150GKT_0
Q6-Q8 = MOSFET N
R1-R23 R25-R36 R39-R50 R55-R71 R74-R98 R101 R110-R127 R152 R161 R241-R248 R274 R275 R301 R333 R2821 R2827-R2832 R2839-R2846 R2855-R2864 R2866 R2867 R2887 R2889 R2891 R2893 R2894 R2921 R2924 R2926-R2947 = R
R72 R73 R102-R109 = R: alternate symbols: ((T:SR0402;B:SR0402,SR0402-BGA))
R2290 = RESISTOR_4
R2291 R2321 R2375 R2376 R2386-R2389 = RES-SM0402_2
R2377-R2379 R2385 R2895 R2904-R2906 R2915-R2920 R2922 R2923 R2925 = RESISTOR
R2380 = RESISTOR_1
R2896-R2903 R2907-R2914 = RESISTOR_0
RN1-RN10 = RND8-4
SIM1 = SIM_RIDER_2
SW1 SW2 = DSW4
T2 = TRNSFMR 67115100_0
U1 U2 = MIC2505
U4 U5 = MT41J64M16LA-15E_0
U7 = HI3535_3
U10 = MT29F2G08ABAEAWP_0
U24 U2050 = RTL8211EG_1
U26 = DS8008_4
U28 = WM-294_0
U81 = LM4990_0
U83 = MAX3232_1: Tolerance: ***; User Part Number: ***
U90 = DS8008_1
U91 = DS8008_2
U92 = GLI8024-48_3
X2 = X3
X3 Y6 = CRYSTAL DIP DT38 R_2.A
X4 X2006 = X

## Footprints (pads in the part's own frame, mm; a bottom-side part is the same pattern mirrored in y, then rotated)
5032-12M
  rect 1.7x2.4 smd: 1(-1.85,0) 2(1.85,0)
ANTENNA_WIFI
  rect 1.05x2.2 smd: 1(-1.475,0) 2(1.475,0)
  rect 1x1.05 smd: 3(0,-1.525)
BAT_CR1220
  round 1.3 hole 1.3 unplated: (0,3.815)
  round 1.2 hole 1.2 unplated: (0,-3.685)
  rect 3.099x4.064 smd: 1(0,8.348) 2(0,-8.134)
BGA96-32-1609G
  round 0.356 smd: A1(-6,-3.2) A2(-6,-2.4) A3(-6,-1.6) A7(-6,1.6) A8(-6,2.4) A9(-6,3.2) B1(-5.2,-3.2) B2(-5.2,-2.4) B3(-5.2,-1.6) B7(-5.2,1.6) B8(-5.2,2.4) B9(-5.2,3.2) C1(-4.4,-3.2) C2(-4.4,-2.4) C3(-4.4,-1.6) C7(-4.4,1.6) C8(-4.4,2.4) C9(-4.4,3.2) D1(-3.6,-3.2) D2(-3.6,-2.4) D3(-3.6,-1.6) D7(-3.6,1.6) D8(-3.6,2.4) D9(-3.6,3.2) E1(-2.8,-3.2) E2(-2.8,-2.4) E3(-2.8,-1.6) E7(-2.8,1.6) E8(-2.8,2.4) E9(-2.8,3.2) F1(-2,-3.2) F2(-2,-2.4) F3(-2,-1.6) F7(-2,1.6) F8(-2,2.4) F9(-2,3.2) G1(-1.2,-3.2) G2(-1.2,-2.4) G3(-1.2,-1.6) G7(-1.2,1.6) G8(-1.2,2.4) G9(-1.2,3.2) H1(-0.4,-3.2) H2(-0.4,-2.4) H3(-0.4,-1.6) H7(-0.4,1.6) H8(-0.4,2.4) H9(-0.4,3.2) J1(0.4,-3.2) J2(0.4,-2.4) J3(0.4,-1.6) J7(0.4,1.6) J8(0.4,2.4) J9(0.4,3.2) K1(1.2,-3.2) K2(1.2,-2.4) K3(1.2,-1.6) K7(1.2,1.6) K8(1.2,2.4) K9(1.2,3.2) L1(2,-3.2) L2(2,-2.4) L3(2,-1.6) L7(2,1.6) L8(2,2.4) L9(2,3.2) M1(2.8,-3.2) M2(2.8,-2.4) M3(2.8,-1.6) M7(2.8,1.6) M8(2.8,2.4) M9(2.8,3.2) N1(3.6,-3.2) N2(3.6,-2.4) N3(3.6,-1.6) N7(3.6,1.6) N8(3.6,2.4) N9(3.6,3.2) P1(4.4,-3.2) P2(4.4,-2.4) P3(4.4,-1.6) P7(4.4,1.6) P8(4.4,2.4) P9(4.4,3.2) R1(5.2,-3.2) R2(5.2,-2.4) R3(5.2,-1.6) R7(5.2,1.6) R8(5.2,2.4) R9(5.2,3.2) T1(6,-3.2) T2(6,-2.4) T3(6,-1.6) T7(6,1.6) T8(6,2.4) T9(6,3.2)
C0402
  rect 0.51x0.51 smd: 1(-0.48,0) 2(0.48,0)
C0603
  rect 0.9x0.7 smd: 1(0,0.7) 2(0,-0.7)
C0805
  rect 1.016x1.27 smd: 1(-1.016,0) 2(1.016,0)
CHOKE_COIL
  rect 0.914x0.508 smd: 1(-1,0.4) 2(1,0.4) 3(1,-0.8) 4(-1,-0.8)
CM315D
  rect 1.1x1.9 smd: 1(-1.25,0) 2(1.25,0)
CONN3_BOX
  rect 1.7x3.048 hole 0.9: 1(-1.27,0)
  oval 1.7x3.048 hole 0.9: 2(1.27,0) 3(3.81,0)
E0402N
  oval 1.27x1.27 hole 0.8: 1(-0.635,0) 2(0.635,0)
ESD0402
  custom 0.6x0.4 smd: 1(-0.495,-0.013)
  custom 0.602x0.403 smd: 2(0.505,-0.013)
HDMI_A
  rect 0.305x1.905 smd: 1(0,0) 2(0.5,0) 3(1,0) 4(1.5,0) 5(2,0) 6(2.5,0) 7(3,0) 8(3.5,0) 9(4,0) 10(4.5,0) 11(5,0) 12(5.5,0) 13(6,0) 14(6.5,0) 15(7,0) 16(7.5,0) 17(8,0) 18(8.5,0) 19(9,0)
  round 2.032 hole 1.397: 20(11.75,0.953) 21(-2.75,0.953) 22(-3.35,5.852) 23(12.35,5.852)
HEADER-4
  rect 2.032x2.032 hole 0.889: 1(0,0)
  round 2.032 hole 0.889: 2(2.5,0) 3(5,0) 4(7.5,0)
HSC0402
  rect 0.508x0.508 smd: 1(-0.406,0) 2(0.406,0)
HSL1008
  rect 0.94x1.905 smd: 1(-1.029,0) 2(1.029,0)
ID-BOARD
  round 1.016 smd: 1(0,0)
L0603
  rect 1.016x1.016 smd: 1(-0.762,0) 2(0.762,0)
MICRO_SIM
  rect 0.65x1.3 smd: 1(2.54,6.35) 2(0,6.35) 3(-2.54,6.35) 5(3.81,6.35) 6(1.27,6.35) 7(-1.27,6.35)
  rect 1.016x1.524 smd: 9(-6.75,4) 10(-6.75,2) 11(6.25,2) 12(6.25,4)
  rect 1.905x1.905 smd: 13(-7,-7.5) 14(6.5,-7.5)
PBGA563-32-2828
  round 1.016 smd: 1(12.5,-12.5) 2(-12.5,12.5)
  round 0.356 smd: A1(-10.8,-10.8) A2(-10.8,-10) A3(-10.8,-9.2) A4(-10.8,-8.4) A5(-10.8,-7.6) A6(-10.8,-6.8) A7(-10.8,-6) A8(-10.8,-5.2) A10(-10.8,-3.6) A12(-10.8,-2) A14(-10.8,-0.4) A16(-10.8,1.2) A18(-10.8,2.8) A20(-10.8,4.4) A21(-10.8,5.2) A23(-10.8,6.8) A24(-10.8,7.6) A25(-10.8,8.4) A26(-10.8,9.2) A27(-10.8,10) A28(-10.8,10.8) AA3(5.2,-9.2) AA4(5.2,-8.4) AA5(5.2,-7.6) AA7(5.2,-6) AA8(5.2,-5.2) AA9(5.2,-4.4) AA10(5.2,-3.6) AA11(5.2,-2.8) AA15(5.2,0.4) AA16(5.2,1.2) AA17(5.2,2) AA18(5.2,2.8) AA19(5.2,3.6) AA22(5.2,6) AA24(5.2,7.6) AA25(5.2,8.4) AA26(5.2,9.2) AA27(5.2,10) AA28(5.2,10.8) AB1(6,-10.8) AB2(6,-10) AB3(6,-9.2) AB4(6,-8.4) AB5(6,-7.6) AB7(6,-6) AB8(6,-5.2) AB9(6,-4.4) AB10(6,-3.6) AB12(6,-2) AB13(6,-1.2) AB14(6,-0.4) AB15(6,0.4) AB16(6,1.2) AB17(6,2) AB18(6,2.8) AB19(6,3.6) AB20(6,4.4) AB21(6,5.2) AB22(6,6) AB24(6,7.6) AB25(6,8.4) AB26(6,9.2) AB27(6,10) AB28(6,10.8) AC1(6.8,-10.8) AC2(6.8,-10) AC3(6.8,-9.2) AC4(6.8,-8.4) AC5(6.8,-7.6) AC24(6.8,7.6) AC25(6.8,8.4) AC26(6.8,9.2) AC27(6.8,10) AC28(6.8,10.8) AD3(7.6,-9.2) AD4(7.6,-8.4) AD5(7.6,-7.6) AD6(7.6,-6.8) AD7(7.6,-6) AD8(7.6,-5.2) AD9(7.6,-4.4) AD10(7.6,-3.6) AD11(7.6,-2.8) AD12(7.6,-2) AD13(7.6,-1.2) AD14(7.6,-0.4) AD15(7.6,0.4) AD16(7.6,1.2) AD17(7.6,2) AD18(7.6,2.8) AD19(7.6,3.6) AD20(7.6,4.4) AD21(7.6,5.2) AD22(7.6,6) AD23(7.6,6.8) AD24(7.6,7.6) AD25(7.6,8.4) AD26(7.6,9.2) AD27(7.6,10) AD28(7.6,10.8) AE1(8.4,-10.8) AE2(8.4,-10) AE3(8.4,-9.2) AE4(8.4,-8.4) AE5(8.4,-7.6) AE6(8.4,-6.8) AE7(8.4,-6) AE8(8.4,-5.2) AE9(8.4,-4.4) AE10(8.4,-3.6) AE11(8.4,-2.8) AE12(8.4,-2) AE13(8.4,-1.2) AE14(8.4,-0.4) AE15(8.4,0.4) AE16(8.4,1.2) AE17(8.4,2) AE18(8.4,2.8) AE19(8.4,3.6) AE20(8.4,4.4) AE21(8.4,5.2) AE22(8.4,6) AE23(8.4,6.8) AE24(8.4,7.6) AE25(8.4,8.4) AE26(8.4,9.2) AE27(8.4,10) AE28(8.4,10.8) AF1(9.2,-10.8) AF2(9.2,-10) AF3(9.2,-9.2) AF4(9.2,-8.4) AF5(9.2,-7.6) AF6(9.2,-6.8) AF7(9.2,-6) AF8(9.2,-5.2) AF9(9.2,-4.4) AF10(9.2,-3.6) AF11(9.2,-2.8) AF12(9.2,-2) AF13(9.2,-1.2) AF14(9.2,-0.4) AF15(9.2,0.4) AF16(9.2,1.2) AF17(9.2,2) AF18(9.2,2.8) AF19(9.2,3.6) AF21(9.2,5.2) AF23(9.2,6.8) AF25(9.2,8.4) AF27(9.2,10) AF28(9.2,10.8) AG1(10,-10.8) AG2(10,-10) AG3(10,-9.2) AG4(10,-8.4) AG6(10,-6.8) AG7(10,-6) AG9(10,-4.4) AG10(10,-3.6) AG12(10,-2) AG13(10,-1.2) AG14(10,-0.4) AG15(10,0.4) AG16(10,1.2) AG17(10,2) AG18(10,2.8) AG19(10,3.6) AG21(10,5.2) AG23(10,6.8) AG25(10,8.4) AG27(10,10) AG28(10,10.8) AH1(10.8,-10.8) AH2(10.8,-10) AH3(10.8,-9.2) AH4(10.8,-8.4) AH6(10.8,-6.8) AH7(10.8,-6) AH9(10.8,-4.4) AH10(10.8,-3.6) AH12(10.8,-2) AH13(10.8,-1.2) AH16(10.8,1.2) AH17(10.8,2) AH18(10.8,2.8) AH19(10.8,3.6) AH21(10.8,5.2) AH23(10.8,6.8) AH25(10.8,8.4) AH27(10.8,10) AH28(10.8,10.8) B1(-10,-10.8) B2(-10,-10) B3(-10,-9.2) B4(-10,-8.4) B5(-10,-7.6) B6(-10,-6.8) B7(-10,-6) B8(-10,-5.2) B10(-10,-3.6) B12(-10,-2) B14(-10,-0.4) B16(-10,1.2) B18(-10,2.8) B20(-10,4.4) B21(-10,5.2) B23(-10,6.8) B24(-10,7.6) B25(-10,8.4) B26(-10,9.2) B27(-10,10) B28(-10,10.8) C1(-9.2,-10.8) C2(-9.2,-10) C3(-9.2,-9.2) C4(-9.2,-8.4) C5(-9.2,-7.6) C6(-9.2,-6.8) C7(-9.2,-6) C8(-9.2,-5.2) C9(-9.2,-4.4) C10(-9.2,-3.6) C11(-9.2,-2.8) C12(-9.2,-2) C13(-9.2,-1.2) C14(-9.2,-0.4) C15(-9.2,0.4) C16(-9.2,1.2) C17(-9.2,2) C18(-9.2,2.8) C19(-9.2,3.6) C20(-9.2,4.4) C21(-9.2,5.2) C22(-9.2,6) C23(-9.2,6.8) C24(-9.2,7.6) C25(-9.2,8.4) C26(-9.2,9.2) D1(-8.4,-10.8) D2(-8.4,-10) D3(-8.4,-9.2) D4(-8.4,-8.4) D5(-8.4,-7.6) D6(-8.4,-6.8) D7(-8.4,-6) D8(-8.4,-5.2) D9(-8.4,-4.4) D10(-8.4,-3.6) D11(-8.4,-2.8) D12(-8.4,-2) D13(-8.4,-1.2) D14(-8.4,-0.4) D15(-8.4,0.4) D16(-8.4,1.2) D17(-8.4,2) D18(-8.4,2.8) D19(-8.4,3.6) D20(-8.4,4.4) D21(-8.4,5.2) D22(-8.4,6) D23(-8.4,6.8) D24(-8.4,7.6) D25(-8.4,8.4) D26(-8.4,9.2) D27(-8.4,10) D28(-8.4,10.8) E1(-7.6,-10.8) E2(-7.6,-10) E3(-7.6,-9.2) E4(-7.6,-8.4) E5(-7.6,-7.6) E6(-7.6,-6.8) E7(-7.6,-6) E8(-7.6,-5.2) E9(-7.6,-4.4) E10(-7.6,-3.6) E11(-7.6,-2.8) E12(-7.6,-2) E13(-7.6,-1.2) E14(-7.6,-0.4) E15(-7.6,0.4) E16(-7.6,1.2) E17(-7.6,2) E18(-7.6,2.8) E19(-7.6,3.6) E20(-7.6,4.4) E21(-7.6,5.2) E22(-7.6,6) E23(-7.6,6.8) E24(-7.6,7.6) E25(-7.6,8.4) E26(-7.6,9.2) E27(-7.6,10) E28(-7.6,10.8) F1(-6.8,-10.8) F2(-6.8,-10) F3(-6.8,-9.2) F4(-6.8,-8.4) F5(-6.8,-7.6) F24(-6.8,7.6) F25(-6.8,8.4) F26(-6.8,9.2) G1(-6,-10.8) G2(-6,-10) G3(-6,-9.2) G4(-6,-8.4) G5(-6,-7.6) G7(-6,-6) G8(-6,-5.2) G9(-6,-4.4) G10(-6,-3.6) G11(-6,-2.8) G13(-6,-1.2) G14(-6,-0.4) G15(-6,0.4) G16(-6,1.2) G17(-6,2) G18(-6,2.8) G19(-6,3.6) G20(-6,4.4) G21(-6,5.2) G22(-6,6) G24(-6,7.6) G25(-6,8.4) G26(-6,9.2) G27(-6,10) G28(-6,10.8) H1(-5.2,-10.8) H2(-5.2,-10) H3(-5.2,-9.2) H4(-5.2,-8.4) H5(-5.2,-7.6) H7(-5.2,-6) H12(-5.2,-2) H13(-5.2,-1.2) H14(-5.2,-0.4) H22(-5.2,6) H24(-5.2,7.6) H25(-5.2,8.4) H26(-5.2,9.2) H27(-5.2,10) H28(-5.2,10.8) J3(-4.4,-9.2) J4(-4.4,-8.4) J5(-4.4,-7.6) J7(-4.4,-6) J22(-4.4,6) J24(-4.4,7.6) J25(-4.4,8.4) J26(-4.4,9.2) J27(-4.4,10) J28(-4.4,10.8) K1(-3.6,-10.8) K2(-3.6,-10) K3(-3.6,-9.2) K4(-3.6,-8.4) K5(-3.6,-7.6) K11(-3.6,-2.8) K12(-3.6,-2) K17(-3.6,2) K18(-3.6,2.8) K22(-3.6,6) K24(-3.6,7.6) K25(-3.6,8.4) K26(-3.6,9.2) L1(-2.8,-10.8) L2(-2.8,-10) L3(-2.8,-9.2) L4(-2.8,-8.4) L5(-2.8,-7.6) L7(-2.8,-6) L12(-2.8,-2) L13(-2.8,-1.2) L14(-2.8,-0.4) L15(-2.8,0.4) L16(-2.8,1.2) L17(-2.8,2) L18(-2.8,2.8) L19(-2.8,3.6) L22(-2.8,6) L24(-2.8,7.6) L25(-2.8,8.4) L26(-2.8,9.2) L27(-2.8,10) L28(-2.8,10.8) M3(-2,-9.2) M4(-2,-8.4) M5(-2,-7.6) M7(-2,-6) M10(-2,-3.6) M11(-2,-2.8) M12(-2,-2) M13(-2,-1.2) M14(-2,-0.4) M15(-2,0.4) M16(-2,1.2) M17(-2,2) M18(-2,2.8) M19(-2,3.6) M22(-2,6) M24(-2,7.6) M25(-2,8.4) M26(-2,9.2) M27(-2,10) M28(-2,10.8) N1(-1.2,-10.8) N2(-1.2,-10) N3(-1.2,-9.2) N4(-1.2,-8.4) N5(-1.2,-7.6) N7(-1.2,-6) N10(-1.2,-3.6) N11(-1.2,-2.8) N12(-1.2,-2) N13(-1.2,-1.2) N14(-1.2,-0.4) N15(-1.2,0.4) N16(-1.2,1.2) N17(-1.2,2) N18(-1.2,2.8) N19(-1.2,3.6) N22(-1.2,6) N24(-1.2,7.6) N25(-1.2,8.4) N26(-1.2,9.2) P1(-0.4,-10.8) P2(-0.4,-10) P3(-0.4,-9.2) P4(-0.4,-8.4) P5(-0.4,-7.6) P7(-0.4,-6) P10(-0.4,-3.6) P11(-0.4,-2.8) P12(-0.4,-2) P13(-0.4,-1.2) P14(-0.4,-0.4) P15(-0.4,0.4) P16(-0.4,1.2) P17(-0.4,2) P18(-0.4,2.8) P19(-0.4,3.6) P22(-0.4,6) P24(-0.4,7.6) P25(-0.4,8.4) P26(-0.4,9.2) P27(-0.4,10) P28(-0.4,10.8) R3(0.4,-9.2) R4(0.4,-8.4) R5(0.4,-7.6) R7(0.4,-6) R10(0.4,-3.6) R11(0.4,-2.8) R12(0.4,-2) R13(0.4,-1.2) R14(0.4,-0.4) R15(0.4,0.4) R16(0.4,1.2) R17(0.4,2) R18(0.4,2.8) R19(0.4,3.6) R21(0.4,5.2) R22(0.4,6) R24(0.4,7.6) R25(0.4,8.4) R26(0.4,9.2) R27(0.4,10) R28(0.4,10.8) T1(1.2,-10.8) T2(1.2,-10) T3(1.2,-9.2) T4(1.2,-8.4) T5(1.2,-7.6) T7(1.2,-6) T8(1.2,-5.2) T10(1.2,-3.6) T11(1.2,-2.8) T12(1.2,-2) T13(1.2,-1.2) T14(1.2,-0.4) T15(1.2,0.4) T16(1.2,1.2) T17(1.2,2) T18(1.2,2.8) T19(1.2,3.6) T21(1.2,5.2) T22(1.2,6) T24(1.2,7.6) T25(1.2,8.4) T26(1.2,9.2) U1(2,-10.8) U2(2,-10) U3(2,-9.2) U4(2,-8.4) U5(2,-7.6) U10(2,-3.6) U11(2,-2.8) U12(2,-2) U13(2,-1.2) U14(2,-0.4) U15(2,0.4) U16(2,1.2) U17(2,2) U18(2,2.8) U19(2,3.6) U21(2,5.2) U22(2,6) U24(2,7.6) U25(2,8.4) U26(2,9.2) U27(2,10) U28(2,10.8) V3(2.8,-9.2) V4(2.8,-8.4) V5(2.8,-7.6) V7(2.8,-6) V10(2.8,-3.6) V11(2.8,-2.8) V12(2.8,-2) V13(2.8,-1.2) V14(2.8,-0.4) V15(2.8,0.4) V16(2.8,1.2) V17(2.8,2) V18(2.8,2.8) V19(2.8,3.6) V22(2.8,6) V24(2.8,7.6) V25(2.8,8.4) V26(2.8,9.2) V27(2.8,10) V28(2.8,10.8) W1(3.6,-10.8) W2(3.6,-10) W3(3.6,-9.2) W4(3.6,-8.4) W5(3.6,-7.6) W7(3.6,-6) W11(3.6,-2.8) W12(3.6,-2) W14(3.6,-0.4) W15(3.6,0.4) W22(3.6,6) W24(3.6,7.6) W25(3.6,8.4) W26(3.6,9.2) W27(3.6,10) W28(3.6,10.8) Y1(4.4,-10.8) Y2(4.4,-10) Y3(4.4,-9.2) Y4(4.4,-8.4) Y5(4.4,-7.6) Y7(4.4,-6) Y8(4.4,-5.2) Y22(4.4,6) Y24(4.4,7.6) Y25(4.4,8.4) Y26(4.4,9.2) Y27(4.4,10) Y28(4.4,10.8)
PHEONIX_CONN_3
  rect 2x2 hole 1.33: 1(0,0)
  round 2 hole 1.33: 2(3.81,0) 3(7.62,0)
QFN64-050-0909LH
  oval 0.254x1.016 smd: 1(-3.75,-4.475) 2(-3.25,-4.475) 3(-2.75,-4.475) 4(-2.25,-4.475) 5(-1.75,-4.475) 6(-1.25,-4.475) 7(-0.75,-4.475) 8(-0.25,-4.475) 9(0.25,-4.475) 10(0.75,-4.475) 11(1.25,-4.475) 12(1.75,-4.475) 13(2.25,-4.475) 14(2.75,-4.475) 15(3.25,-4.475) 16(3.75,-4.475) 33(3.75,4.475) 34(3.25,4.475) 35(2.75,4.475) 36(2.25,4.475) 37(1.75,4.475) 38(1.25,4.475) 39(0.75,4.475) 40(0.25,4.475) 41(-0.25,4.475) 42(-0.75,4.475) 43(-1.25,4.475) 44(-1.75,4.475) 45(-2.25,4.475) 46(-2.75,4.475) 47(-3.25,4.475) 48(-3.75,4.475)
  oval 1.016x0.254 smd: 17(4.475,-3.75) 18(4.475,-3.25) 19(4.475,-2.75) 20(4.475,-2.25) 21(4.475,-1.75) 22(4.475,-1.25) 23(4.475,-0.75) 24(4.475,-0.25) 25(4.475,0.25) 26(4.475,0.75) 27(4.475,1.25) 28(4.475,1.75) 29(4.475,2.25) 30(4.475,2.75) 31(4.475,3.25) 32(4.475,3.75) 49(-4.475,3.75) 50(-4.475,3.25) 51(-4.475,2.75) 52(-4.475,2.25) 53(-4.475,1.75) 54(-4.475,1.25) 55(-4.475,0.75) 56(-4.475,0.25) 57(-4.475,-0.25) 58(-4.475,-0.75) 59(-4.475,-1.25) 60(-4.475,-1.75) 61(-4.475,-2.25) 62(-4.475,-2.75) 63(-4.475,-3.25) 64(-4.475,-3.75)
  rect 5.74x5.74 smd: 65(0,0)
R0402
  rect 0.51x0.51 smd: 1(-0.48,0) 2(0.48,0)
SC0402
  rect 0.508x0.508 smd: 1(-0.406,0) 2(0.406,0)
SC0603
  rect 0.762x0.813 smd: 1(-0.699,0) 2(0.699,0)
SC0805
  rect 0.991x1.27 smd: 1(-0.813,0) 2(0.813,0)
SC1206
  rect 1.295x1.651 smd: 1(-1.346,0) 2(1.346,0)
SD0805-LED
  rect 1.27x1.397 smd: 1(-1.016,0) 2(1.016,0)
SDSW8-L
  rect 1.143x3.556 smd: 1(-3.81,-4.089) 2(-1.27,-4.089) 3(1.27,-4.089) 4(3.81,-4.089) 5(3.81,4.089) 6(1.27,4.089) 7(-1.27,4.089) 8(-3.81,4.089)
SI-51009-F
  round 3.683 hole 3.429 unplated: (7.62,5.715) (7.62,-5.715)
  round 1.524 hole 0.914: 1(-1.27,-5.715) 2(1.27,-4.445) 3(-1.27,-3.175) 4(1.27,-1.905) 5(-1.27,-0.635) 6(1.27,0.635) 7(-1.27,1.905) 8(1.27,3.175) 9(-1.27,4.445) 10(1.27,5.715)
  round 1.778 hole 1.118: 11(11.68,-6.63) 12(11.68,-4.09) 13(11.68,4.09) 14(11.68,6.63)
  round 1.778 hole 1.651: 15(4.572,7.747) 16(4.572,-7.747)
SL0402
  rect 0.483x0.508 smd: 1(-0.394,0) 2(0.394,0)
SL0603
  rect 0.711x0.813 smd: 1(-0.74,0) 2(0.74,0)
SL0805
  rect 0.94x1.27 smd: 1(-0.851,0) 2(0.851,0)
SLP2510P8
  oval 1x1 hole 0.7: 1(-1,-0.437) 2(-0.5,-0.437) 4(0.5,-0.437) 5(1,-0.437) 6(1,0.437) 7(0.5,0.437) 9(-0.5,0.437) 10(-1,0.437)
  rect 0.51x0.51 smd: 3(0,-0.388) 8(0,0.388)
SM0603LED_AC
  rect 0.914x0.914 smd: A(-0.762,0) C(0.762,0)
SMC0402
  rect 0.508x0.61 smd: 1(-0.457,0) 2(0.457,0)
SMC0603
  rect 0.813x0.889 smd: 1(-0.66,0) 2(0.66,0)
SMR0402
  rect 0.508x0.61 smd: 1(-0.457,0) 2(0.457,0)
SMR0603
  rect 0.813x0.889 smd: 1(-0.66,0) 2(0.66,0)
SOD123
  rect 0.91x1.22 smd: 1(1.635,0) 2(-1.635,0)
SOD523
  rect 0.6x0.7 smd: 1(0.71,0) 2(-0.71,0)
SOIC16
  rect 1.27x0.635 smd: 1(-2.477,4.445) 2(-2.477,3.175) 3(-2.477,1.905) 4(-2.477,0.635) 5(-2.477,-0.635) 6(-2.477,-1.905) 7(-2.477,-3.175) 8(-2.477,-4.445) 9(2.477,-4.445) 10(2.477,-3.175) 11(2.477,-1.905) 12(2.477,-0.635) 13(2.477,0.635) 14(2.477,1.905) 15(2.477,3.175) 16(2.477,4.445)
SOIC-8
  rect 1.092x0.508 smd: 1(-2.55,1.905) 2(-2.55,0.635) 3(-2.55,-0.635) 4(-2.55,-1.905) 5(2.55,-1.905) 6(2.55,-0.635) 7(2.55,0.635) 8(2.55,1.905)
SOP8-50-150
  rect 0.635x1.778 smd: 1(-1.905,-2.667) 2(-0.635,-2.667) 3(0.635,-2.667) 4(1.905,-2.667) 5(1.905,2.667) 6(0.635,2.667) 7(-0.635,2.667) 8(-1.905,2.667)
SOP48-20-720A
  rect 0.254x1.651 smd: 1(-5.75,-9.703) 2(-5.25,-9.703) 3(-4.75,-9.703) 4(-4.25,-9.703) 5(-3.75,-9.703) 6(-3.25,-9.703) 7(-2.75,-9.703) 8(-2.25,-9.703) 9(-1.75,-9.703) 10(-1.25,-9.703) 11(-0.75,-9.703) 12(-0.25,-9.703) 13(0.25,-9.703) 14(0.75,-9.703) 15(1.25,-9.703) 16(1.75,-9.703) 17(2.25,-9.703) 18(2.75,-9.703) 19(3.25,-9.703) 20(3.75,-9.703) 21(4.25,-9.703) 22(4.75,-9.703) 23(5.25,-9.703) 24(5.75,-9.703) 25(5.75,9.703) 26(5.25,9.703) 27(4.75,9.703) 28(4.25,9.703) 29(3.75,9.703) 30(3.25,9.703) 31(2.75,9.703) 32(2.25,9.703) 33(1.75,9.703) 34(1.25,9.703) 35(0.75,9.703) 36(0.25,9.703) 37(-0.25,9.703) 38(-0.75,9.703) 39(-1.25,9.703) 40(-1.75,9.703) 41(-2.25,9.703) 42(-2.75,9.703) 43(-3.25,9.703) 44(-3.75,9.703) 45(-4.25,9.703) 46(-4.75,9.703) 47(-5.25,9.703) 48(-5.75,9.703)
SOT23
  rect 0.508x0.432 smd: 1(-0.889,0.94) 2(-0.889,-0.965) 3(0.889,0)
SOT23-5
  rect 0.65x1.06 smd: 1(-0.95,-1.1) 2(0,-1.1) 3(0.95,-1.1) 4(0.95,1.1) 5(-0.95,1.1)
SR0402
  rect 0.508x0.508 smd: 1(-0.406,0) 2(0.406,0)
SR0603
  rect 0.711x0.813 smd: 1(-0.737,0) 2(0.737,0)
SRN8-0804
  rect 0.279x0.533 smd: 1(-0.762,-0.521) 2(-0.254,-0.521) 3(0.254,-0.521) 4(0.762,-0.521) 5(0.762,0.521) 6(0.254,0.521) 7(-0.254,0.521) 8(-0.762,0.521)
SSOP28
  rect 0.432x2.261 smd: 1(-4.225,-3.378) 2(-3.575,-3.378) 3(-2.925,-3.378) 4(-2.275,-3.378) 5(-1.625,-3.378) 6(-0.975,-3.378) 7(-0.325,-3.378) 8(0.325,-3.378) 9(0.975,-3.378) 10(1.625,-3.378) 11(2.275,-3.378) 12(2.925,-3.378) 13(3.575,-3.378) 14(4.225,-3.378) 15(4.225,3.378) 16(3.575,3.378) 17(2.925,3.378) 18(2.275,3.378) 19(1.625,3.378) 20(0.975,3.378) 21(0.325,3.378) 22(-0.325,3.378) 23(-0.975,3.378) 24(-1.625,3.378) 25(-2.275,3.378) 26(-2.925,3.378) 27(-3.575,3.378) 28(-4.225,3.378)
STC3528
  rect 1.727x2.286 smd: 1(-1.499,0) 2(1.499,0)
STC7343
  rect 2.54x2.413 smd: 1(-3.429,0) 2(3.429,0)
SX2-1205
  rect 4.826x1.524 smd: 1(-4.85,0) 2(4.85,0)
WIFI_BT_R
  oval 1.6x3 smd: 1(-5,-6.2) 2(-2.2,-6.2) 3(1.3,-6.2) 4(3.8,-6.2) 5(4.3,6.2) 6(2.3,6.2)

## Nets
1V1_CORE: C3.1(A) C4.1(A) C5.1(A) C15.1(A) C16.1(A) C28.1(A) C29.1(A) C30.1(A) C31.1(A) C32.1(A) C33.1(A) C36.1(A) C175.1(A) C176.1(A) C177.1(A) C194.1(A) C195.1(A) C201.1(A) C202.1(A) C229.1(A) C230.1(A) LB4.1 LB5.1 LB7.2 LB9.1 LB12.1 LB13.1 U7.K11(DVDD_CORE1) U7.K12(DVDD_CORE2) U7.K17(DVDD_CORE3) U7.K18(DVDD_CORE4) U7.L19(DVDD_CORE5) U7.M10(DVDD_CORE6) U7.M19(DVDD_CORE7) U7.N10(DVDD_CORE8) U7.N19(DVDD_CORE9) U7.P10(DVDD_CORE10) U7.P19(DVDD_CORE11) U7.R10(DVDD_CORE12) U7.R19(DVDD_CORE13) U7.T10(DVDD_CORE14) U7.T19(DVDD_CORE15) U7.U10(DVDD_CORE16) U7.U19(DVDD_CORE17) U7.V10(DVDD_CORE18) U7.V19(DVDD_CORE19) U7.W11(DVDD_CORE20) U7.W12(DVDD_CORE21) U7.W14(DVDD_CORE22) U7.W15(DVDD_CORE23)
1V2_CPU: C6.1(A) C7.1(A) C8.1(A) C21.1(A) C22.1(A) C23.1(A) C24.1(A) C25.1(A) C42.1(A) C75.1(A) C76.1(A) C137.1 C138.1 C140.1(A) C180.1(A) C181.1(A) C182.1(A) C206.1(A) U7.A1(DVDD_CPU1) U7.A2(DVDD_CPU2) U7.A3(DVDD_CPU3) U7.B1(DVDD_CPU4) U7.B2(DVDD_CPU5) U7.B3(DVDD_CPU6) U7.B4(DVDD_CPU7) U7.C2(DVDD_CPU8) U7.C3(DVDD_CPU9) U7.C4(DVDD_CPU10) U7.C5(DVDD_CPU11) U7.D3(DVDD_CPU12) U7.D4(DVDD_CPU13) U7.D5(DVDD_CPU14) U7.D6(DVDD_CPU15) U7.E4(DVDD_CPU16) U7.E5(DVDD_CPU17) U7.E6(DVDD_CPU18) U7.E7(DVDD_CPU19) U7.F5(DVDD_CPU20) U7.G7(DVDD_CPU21) U7.G8(DVDD_CPU22) U7.H7(DVDD_CPU23)
1V5: C11.1(A) C12.1(A) C13.1(A) C14.1(A) C50.1(A) C51.1(A) C52.1(A) C53.1(A) C54.1(A) C55.1(A) C56.1(A) C57.1(A) C58.1(A) C59.1(A) C60.1(A) C61.1(A) C62.1(A) C63.1(A) C64.1(A) C65.1(A) C66.1(A) C87.1(A) C88.1(A) C89.1(A) C90.1(A) C91.1(A) C92.1(A) C93.1(A) C94.1(A) C96.1(A) C97.1(A) C100.1(A) C101.1(A) C102.1(A) C103.1(A) C104.1(A) C105.1(A) C106.1(A) C107.1(A) C108.1(A) C109.1(A) C110.1(A) C111.1(A) C112.1(A) C113.1(A) C114.1(A) C115.1(A) C116.1(A) C117.1(A) C118.1(A) C119.1(A) C120.1(A) C121.1(A) C122.1(A) C123.1(A) C124.1(A) C125.1(A) C127.1(A) C128.1(A) C130.1(A) C131.1(A) C141.1(A) C142.1(A) C143.1(A) C183.1(A) C184.1(A) C221.1(A) C222.1(A) C223.1(A) R42.1(A) R43.1(A) R104.2(B) R105.2(B) R108.2(B) R109.2(B) U4.A1(VDDQ1) U4.A8(VDDQ2) U4.B2(VDD1) U4.C1(VDDQ3) U4.C9(VDDQ4) U4.D2(VDDQ5) U4.D9(VDD2) U4.E9(VDDQ6) U4.F1(VDDQ7) U4.G7(VDD3) U4.H2(VDDQ8) U4.H9(VDDQ9) U4.K2(VDD4) U4.K8(VDD5) U4.N1(VDD6) U4.N9(VDD7) U4.R1(VDD8) U4.R9(VDD9) U5.A1(VDDQ1) U5.A8(VDDQ2) U5.B2(VDD1) U5.C1(VDDQ3) U5.C9(VDDQ4) U5.D2(VDDQ5) U5.D9(VDD2) U5.E9(VDDQ6) U5.F1(VDDQ7) U5.G7(VDD3) U5.H2(VDDQ8) U5.H9(VDDQ9) U5.K2(VDD4) U5.K8(VDD5) U5.N1(VDD6) U5.N9(VDD7) U5.R1(VDD8) U5.R9(VDD9) U7.AA5(VDDIO_DDR9) U7.AA7(VDDIO_DDR10) U7.AA9(VDDIO_CK_DDR1) U7.AB7(VDDIO_DDR11) U7.AB9(VDDIO_CK_DDR2) U7.AB12(VDDIO_DDR12) U7.AB13(VDDIO_DDR13) U7.AD4(VDDIO_DDR14) U7.AD5(VDDIO_DDR15) U7.AD6(VDDIO_DDR16) U7.AD8(VDDIO_DDR17) U7.AD9(VDDIO_DDR18) U7.AD11(VDDIO_DDR19) U7.AD12(VDDIO_DDR20) U7.AD13(VDDIO_DDR21) U7.AE3(VDDIO_DDR22) U7.AE4(VDDIO_DDR23) U7.AF2(VDDIO_DDR24) U7.AF3(VDDIO_DDR25) U7.AG1(VDDIO_DDR26) U7.AG2(VDDIO_DDR27) U7.AH1(VDDIO_DDR28) U7.AH2(VDDIO_DDR29) U7.M5(VDDIO_DDR1) U7.N5(VDDIO_DDR2) U7.N7(VDDIO_DDR3) U7.P7(VDDIO_DDR4) U7.T5(VDDIO_DDR5) U7.V7(VDDIO_DDR6) U7.W7(VDDIO_DDR7) U7.Y8(VDDIO_DDR8)
3V3: C9.1(A) C10.1(A) C19.1(A) C26.1(A) C41.1(A) C43.1(A) C45.1(A) C46.1(A) C47.1(A) C48.1(A) C49.1(A) C139.1(A) C159.1(A) C160.1(A) C161.1(A) C162.1(A) C204.1(A) C220.1(A) C408.1(A) C2046.2 C2173.1(A) C2897.1 C2898.2 C2899.1 D49.1(A) FB3.1 FB5.1 FB1605.2 LB1.2 LB2.1 LB3.2 LB6.1 LB8.1 LB10.2 LB11.1 LB14.2 LB15.2 LB16.2 LB2114.2 LB2115.2 Q6.1(GATE) Q7.1(GATE) R1.2(B) R6.1(A) R19.1(A) R22.1(A) R25.1(A) R27.1(A) R29.1(A) R35.1(A) R36.1(A) R39.1(A) R44.1(A) R45.1(A) R46.1(A) R47.1(A) R48.1(A) R49.1(A) R50.1(A) R55.1(A) R75.1(A) R77.2(B) R116.1(A) R123.1(A) R124.1(A) R2290.1 R2377.2 R2378.2 R2385.1 R2887.2(B) R2904.1 R2915.1 R2917.1 R2919.1 U7.AA15(DVDD33_10) U7.AB15(DVDD33_11) U7.G9(DVDD33_1) U7.G10(DVDD33_2) U7.G18(DVDD33_3) U7.G21(DVDD33_4) U7.G22(DVDD33_5) U7.H22(DVDDIO_RGMII1_1) U7.J22(DVDDIO_RGMII1_2) U7.K22(DVDDIO_RGMII1_3) U7.L7(DVDD33_6) U7.L22(DVDDIO_RGMII0_1) U7.M22(DVDDIO_RGMII0_2) U7.P22(DVDD33_7) U7.V22(DVDD33_8) U7.W22(DVDD33_9) U10.12(VCC1) U10.37(VCC2) U83.16(VCC) U92.16(DVDD) U92.24(V33)
3V3_ZWAVE: C224.2 C2174.1 FB5.2 R2291.2
5V0: C168.1(A) C2050.1 C2052.1 C2187.2 D2.1(A) J1852.18 R101.1(A) U1.5(IN1) U1.7(IN2) U26.1(IN)
5V0_USB: C164.1(A) R98.1(A) U2.5(IN1) U2.7(IN2)
5V0_USB1: C165.1(A) C173.1 R97.2(B) R98.2(B) U2.6(OUT1) U2.8(OUT2)
5V0_USB2: C169.1(A) C174.1 R96.2(B) R101.2(B) U1.6(OUT1) U1.8(OUT2)
AVDD11_USB3: C83.1(A) C84.1(A) C86.1(A) LB7.1 U7.L12(AVDD11_VP_USB3) U7.L13(AVDD11_VPTX0_USB3) U7.L14(DVDD11_USB3)
AVDD11_VP_SATA: C79.1(A) C80.1(A) C191.1(A) LB5.2 U7.AA18(AVDD11_VP_SATA1) U7.AB18(AVDD11_VP_SATA2)
AVDD11_VPTX_SATA: C18.1(A) C77.1(A) C78.1(A) LB4.2 U7.V16(AVDD11_VPTX0_SATA) U7.V17(AVDD11_VPTX1_SATA) U7.V18(AVDD11_VPTX2_SATA)
AVDD33_AC: C71.1(A) C72.1(A) C133.1(A) LB2.2 U7.G19(AVDD33_AC1) U7.G20(AVDD33_AC2)
AVDD33_BAT: BT1.1 C158.2(B) C1980.2 D49.2(K) U7.U24(AVDD_BAT) U81.8(VCC)
AVDD33_RTC: C69.1(A) LB11.2 U7.U21(AVDD33_RTC)
AVDD33_SATA: C81.1(A) C82.1(A) C192.1(A) LB6.2 U7.AA19(AVDD33_VPH_SATA0) U7.AB19(AVDD33_VPH_SATA1)
AVDD33_USB2: C73.1(A) C190.1(A) LB3.1 U7.AA17(AVDD33_USB2_1) U7.AB17(AVDD33_USB2_2)
AVDD33_USB3: C70.1(A) C188.1(A) LB1.1 U7.H12(AVDD33_USB3)
AVDD33_VDAC: C419.1(A) C426.1(A) C427.1(A) LB14.1 U7.G16(AVDD33_VDAC1) U7.G17(AVDD33_VDAC2)
